# Altium PCB syspcb.PcbDoc (part 1 of 2)
Units mm, origin at the board's own origin, x right, y up, seen from the top; angles counter-clockwise.
Board outline 95.88 x 90.17 mm, 4 copper layers (TOP, GND, VCC, BOT), stack 0.778 mm thick; 67 components, 76 nets, 283 pads, 156 vias.
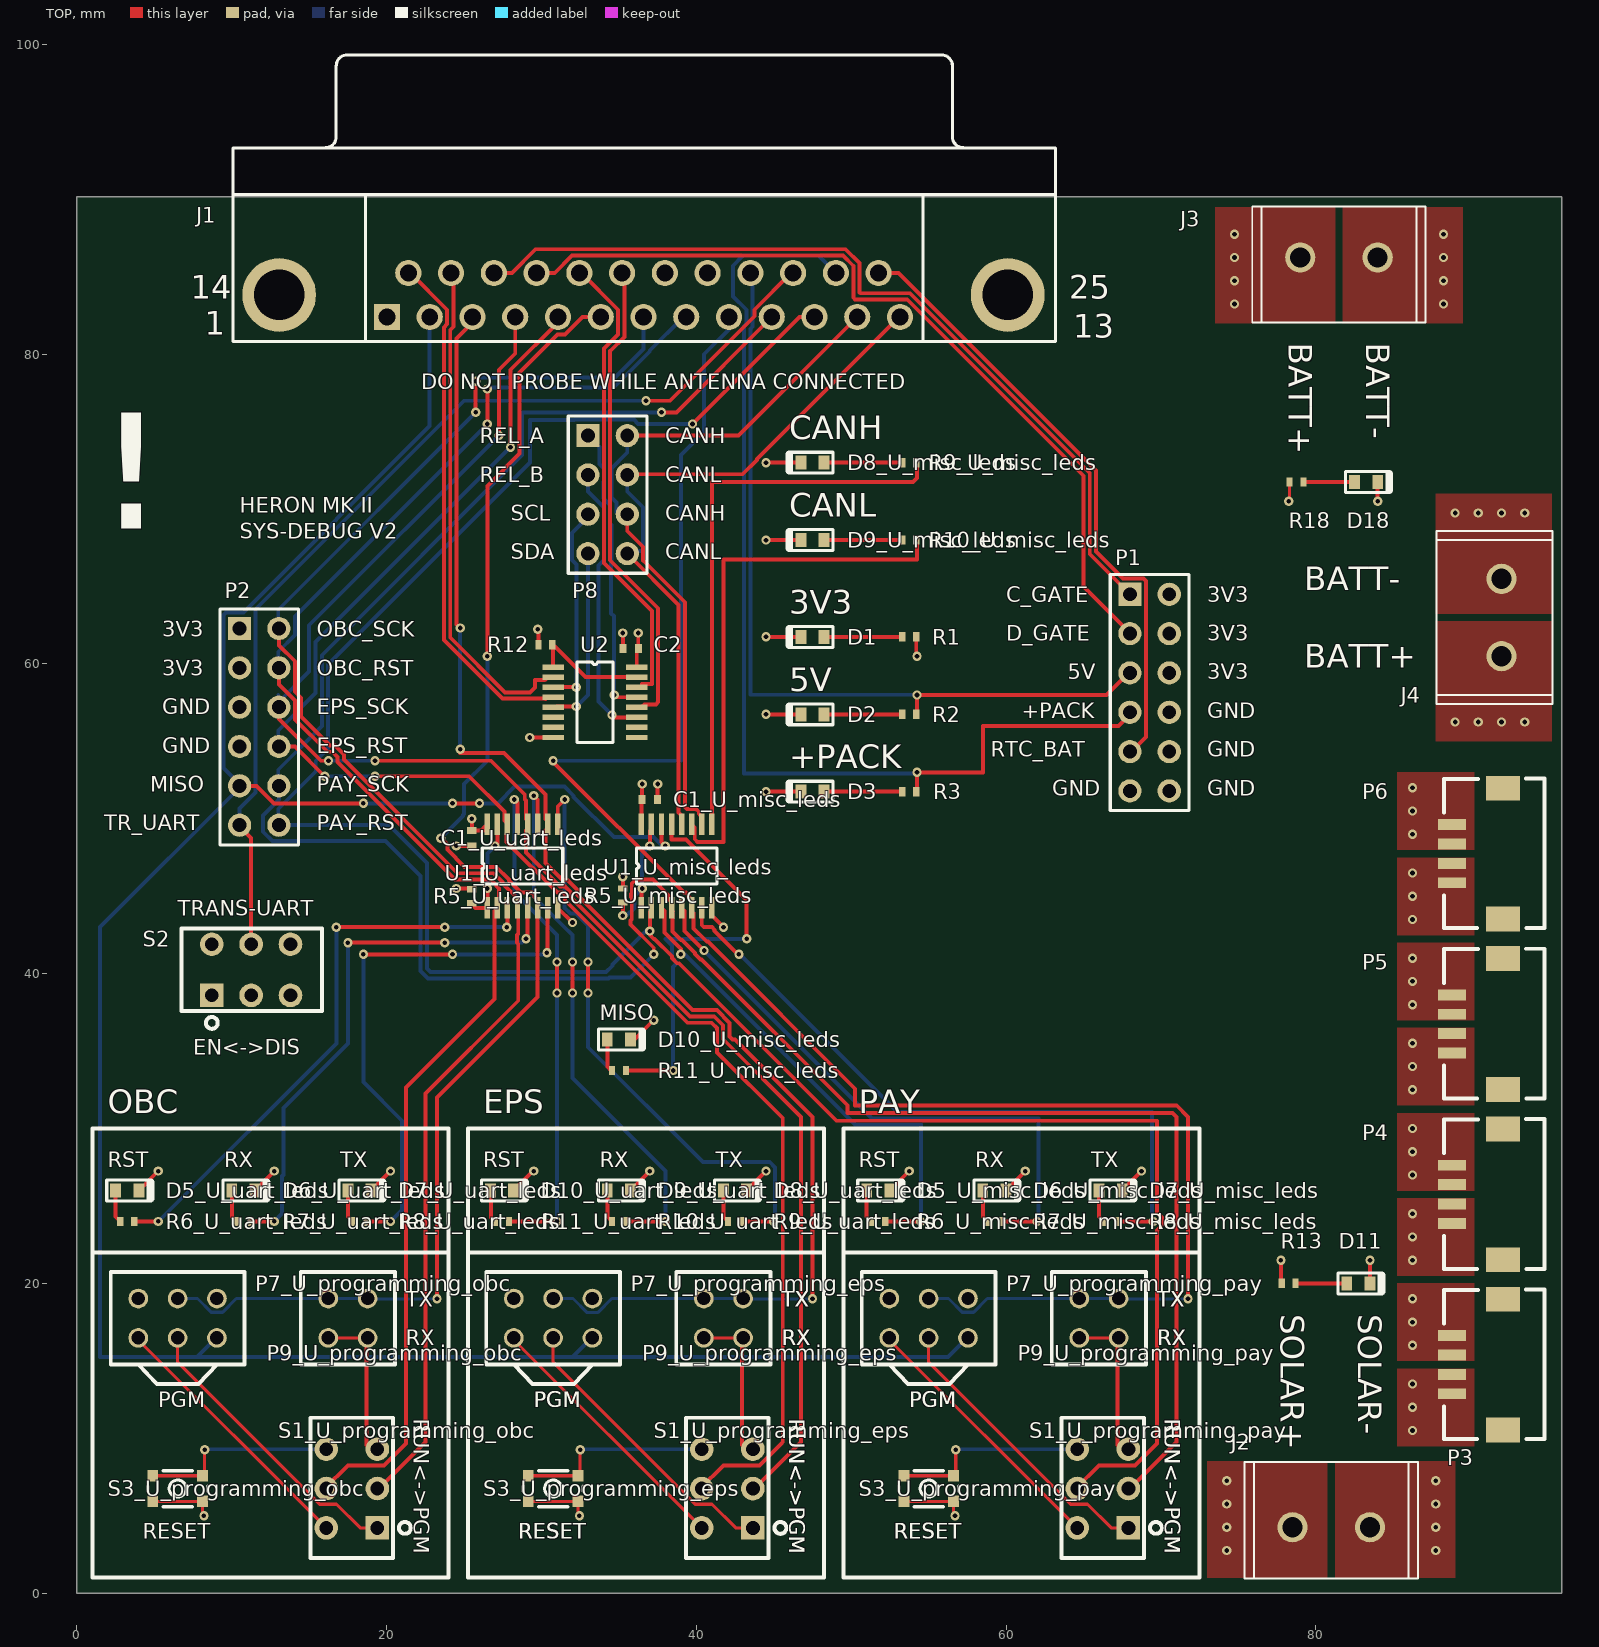
[diagram p0: TOP view]
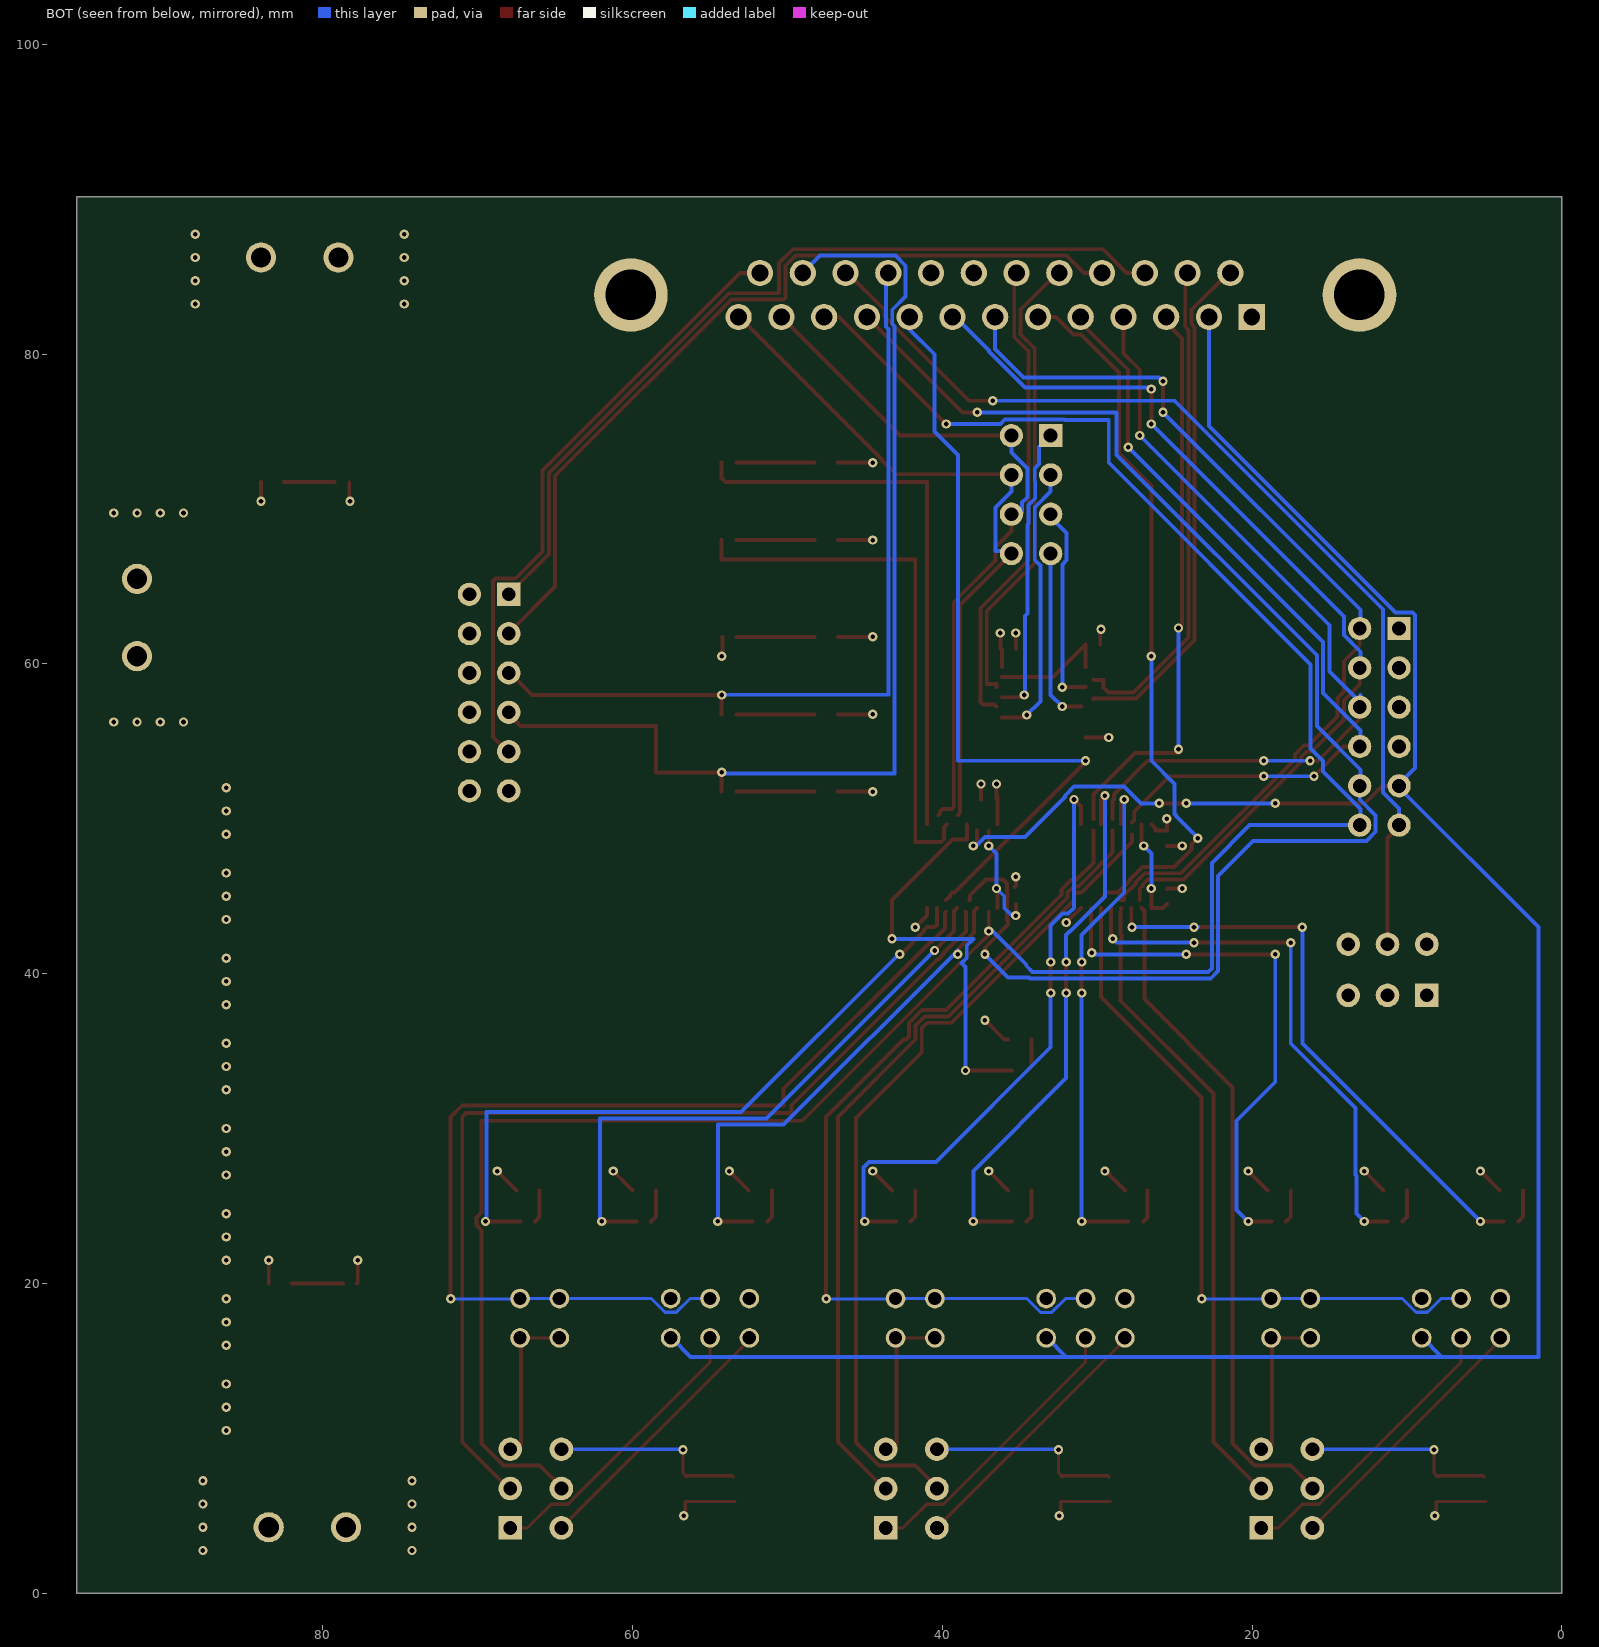
[diagram p1: BOT view, seen from below]
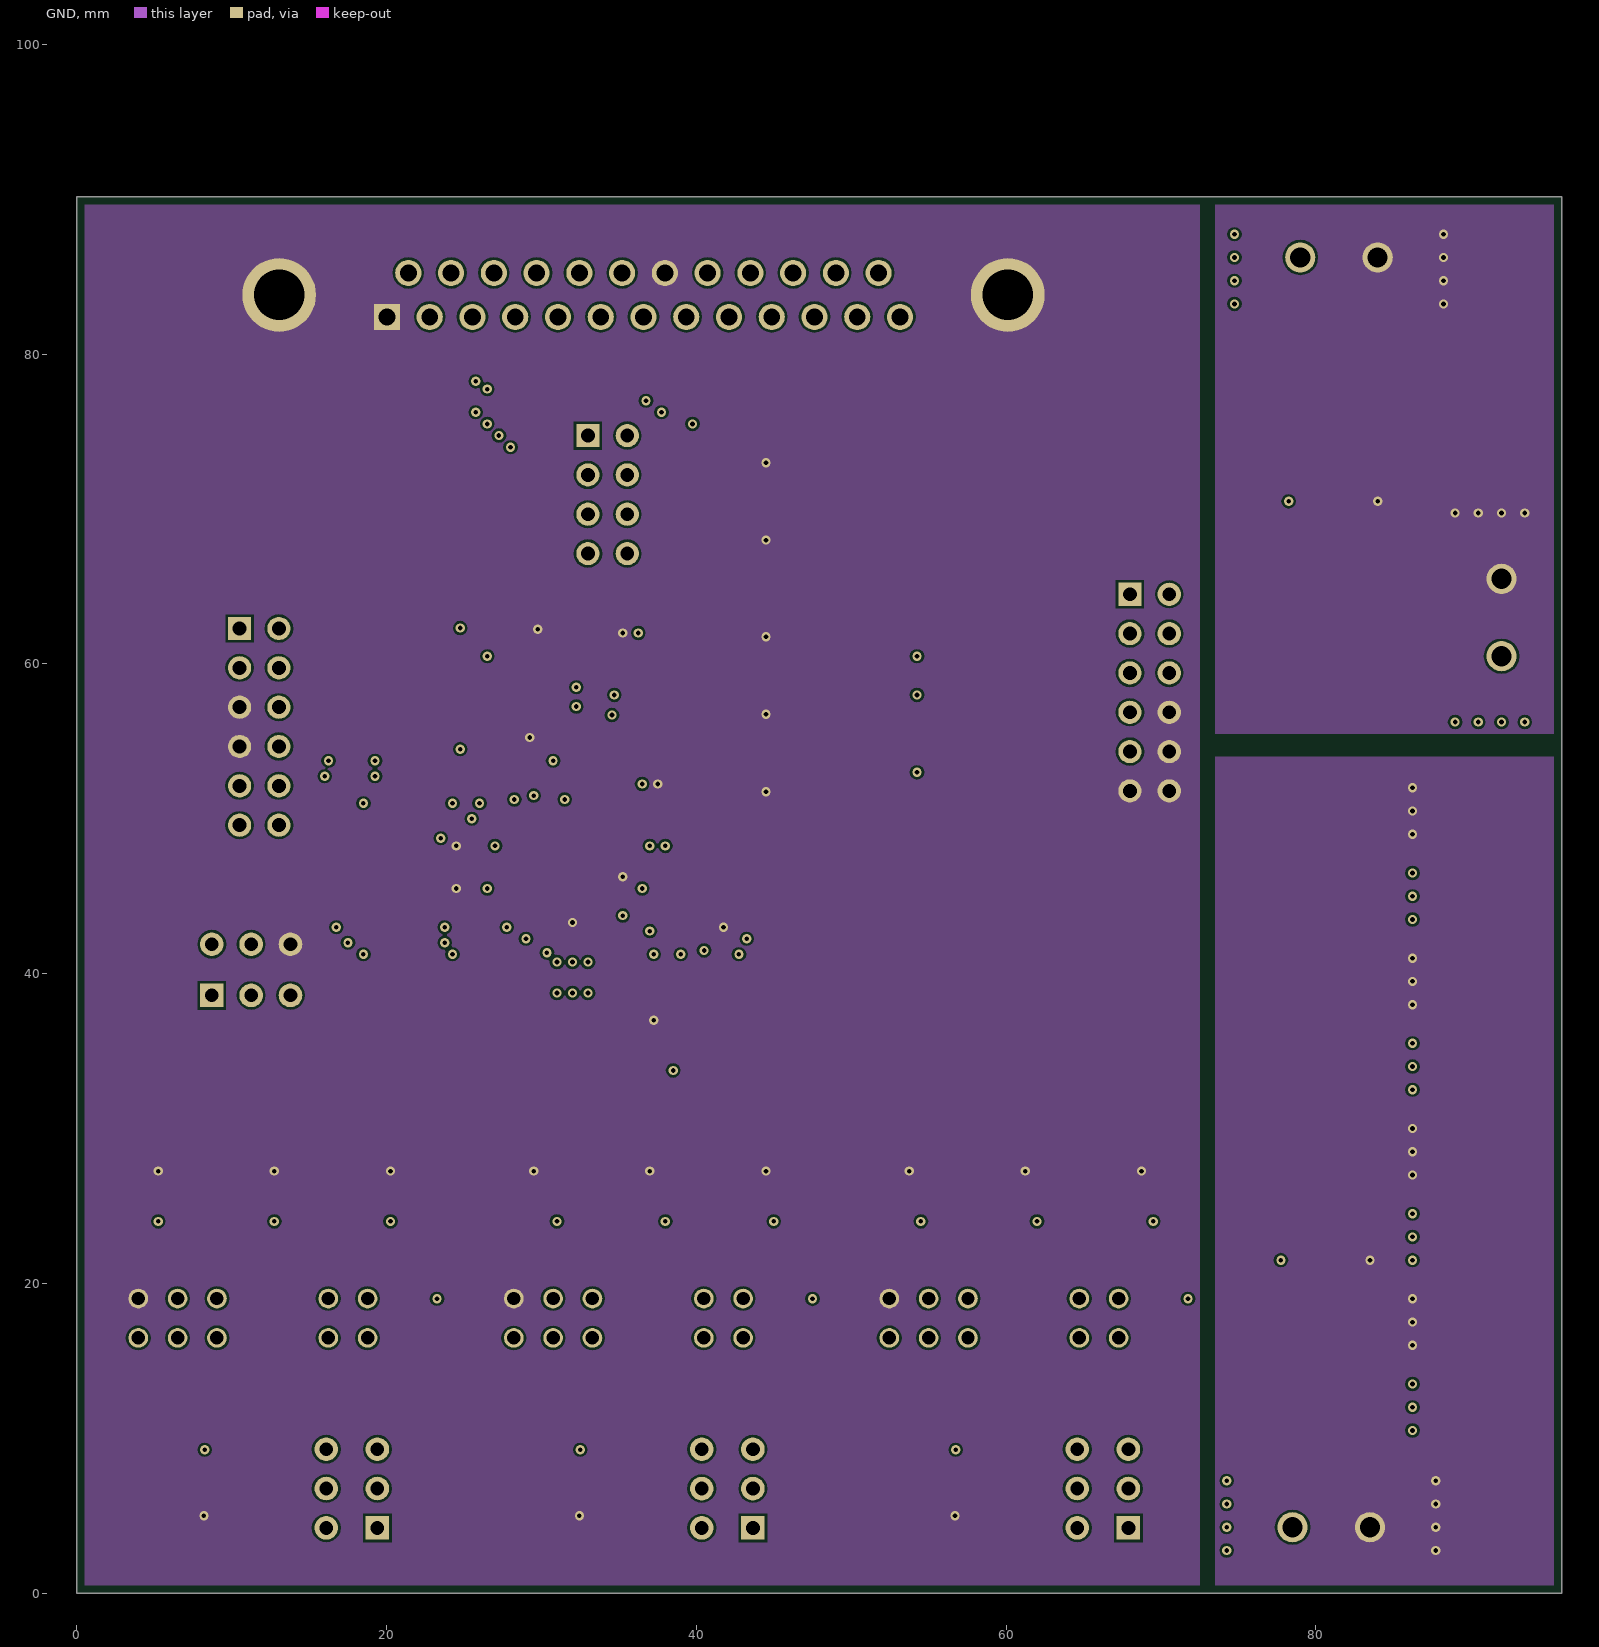
[diagram p2: GND]
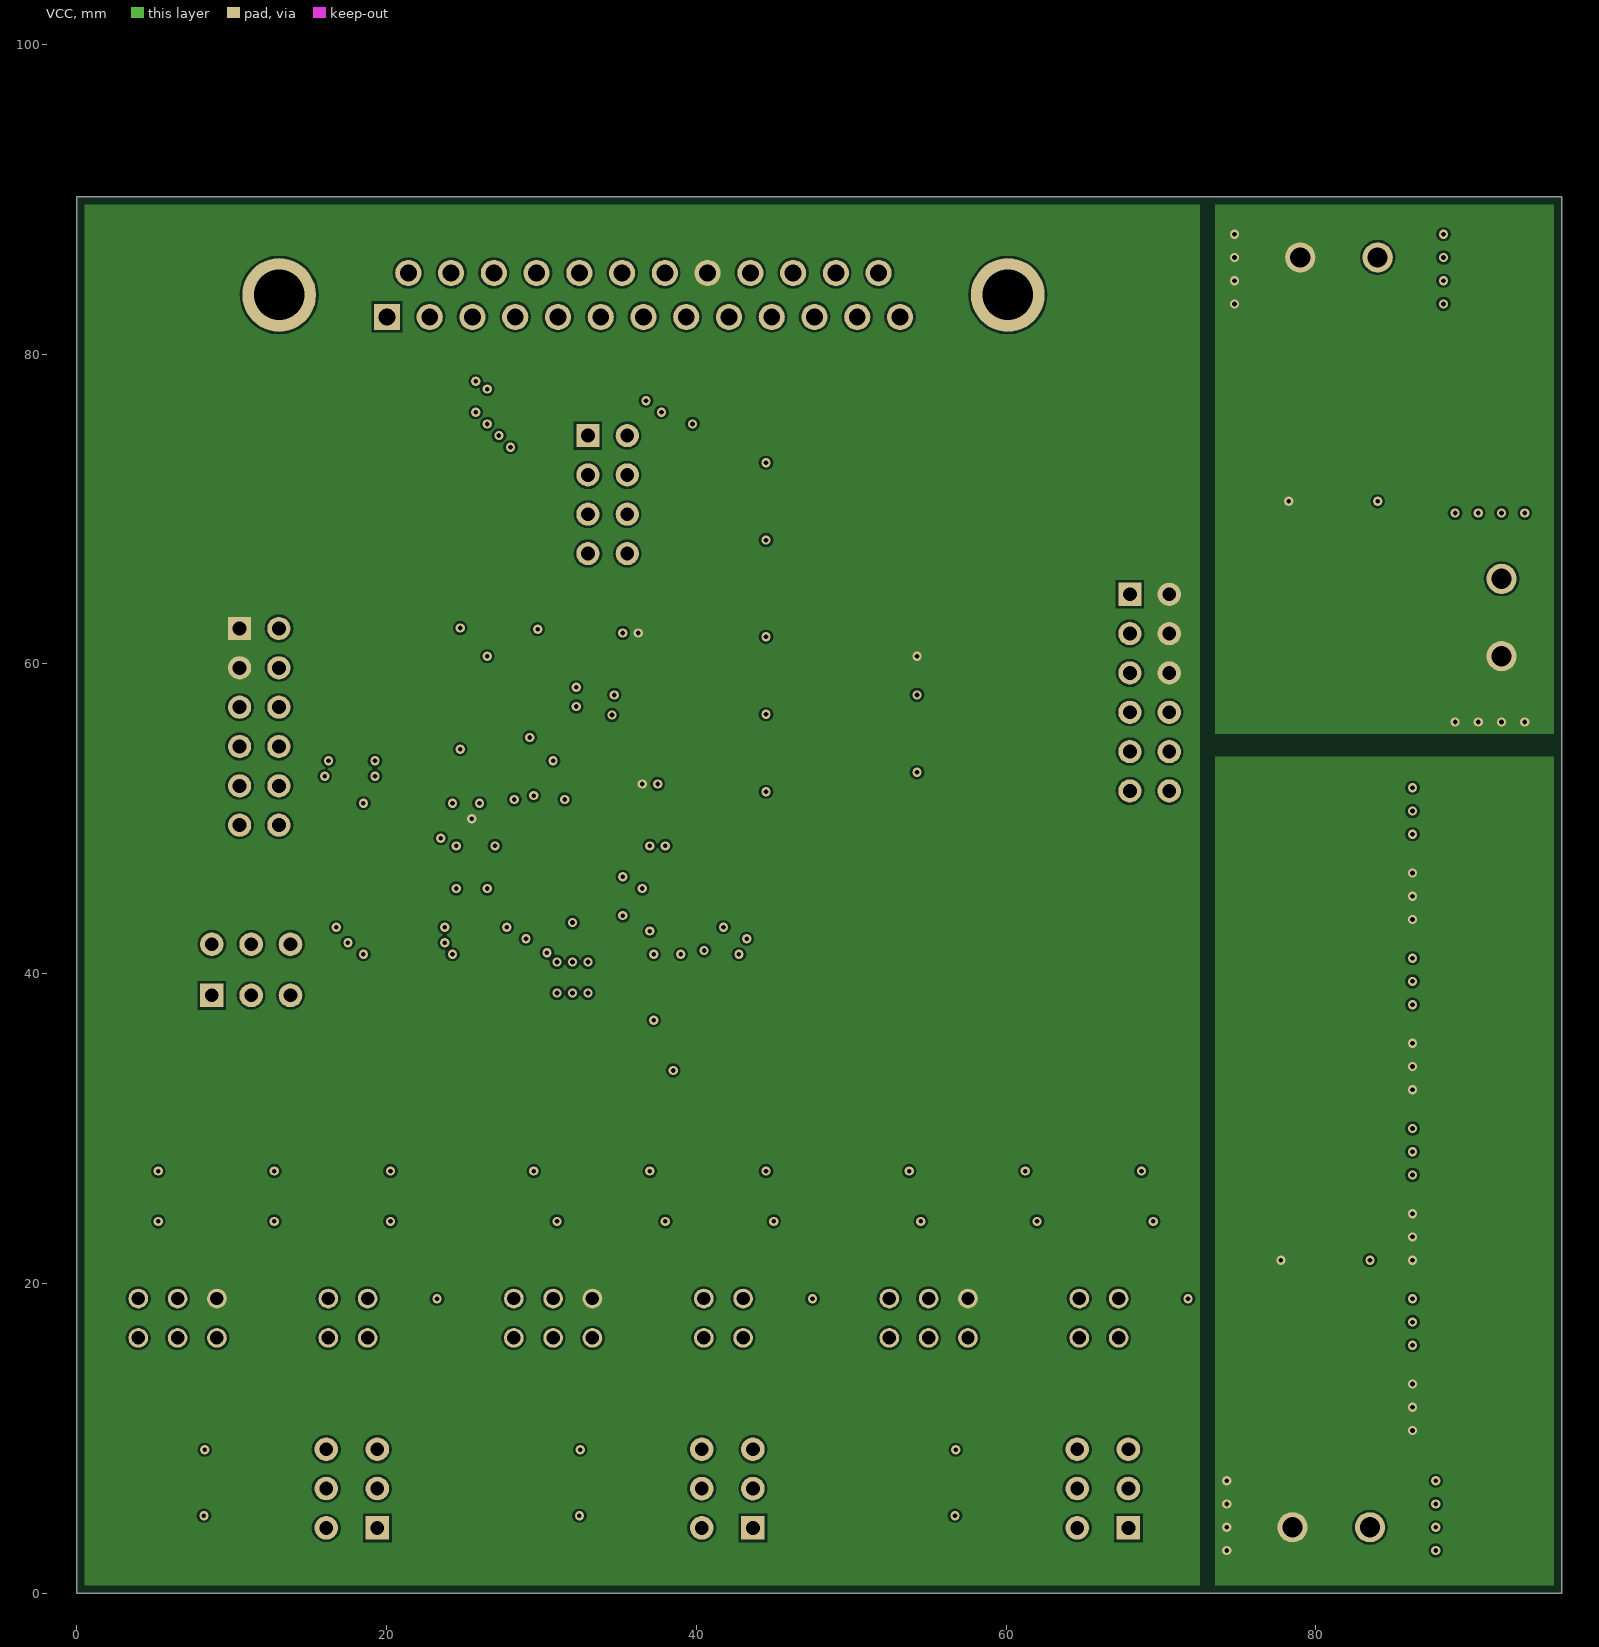
[diagram p3: VCC]
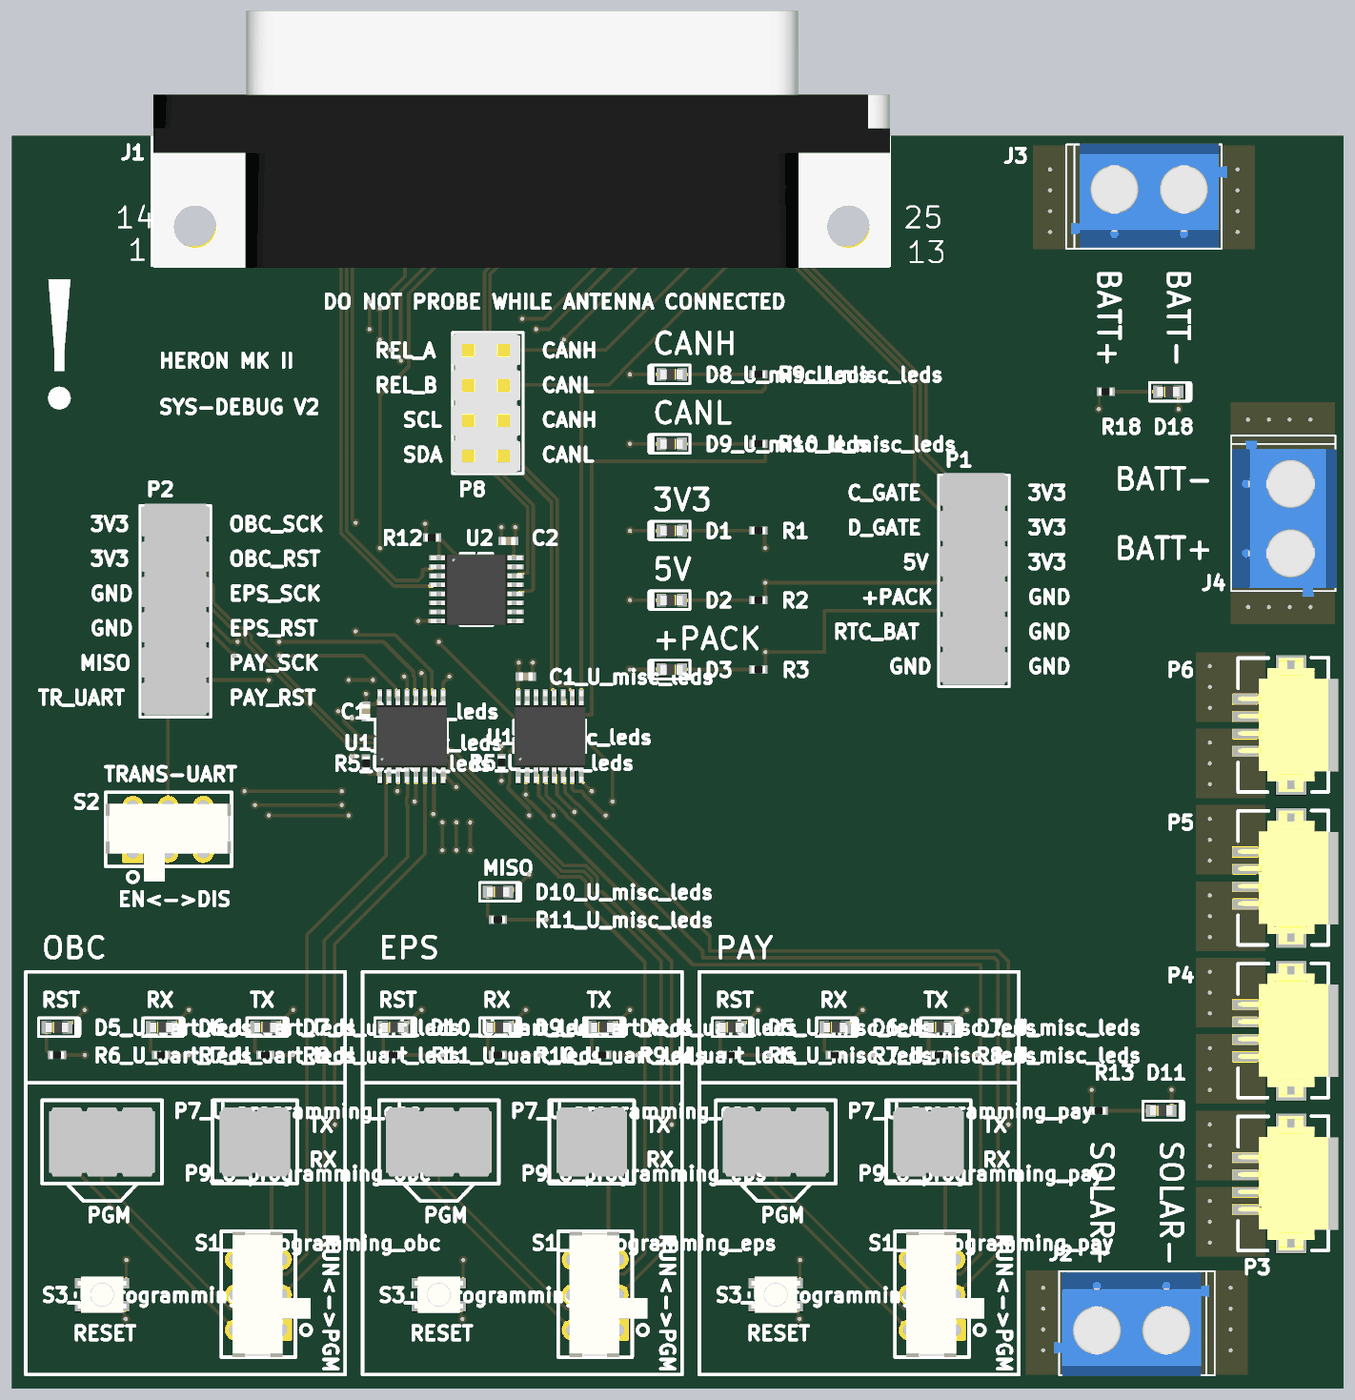
[diagram p4: 3D render of the assembled board from above, using the file's embedded part models]

## Layer stack, top to bottom
Top Solder: solder mask 0.0102, Solder Resist, Dk 3.5
TOP: signal copper 0.0356
Dielectric 1: core 0.254, FR-4, Dk 4.2
GND: signal copper 0.036
Dielectric 3: prepreg 0.127, Dk 4.2
VCC: signal copper 0.036
Dielectric 2: core 0.254, Dk 4.2
BOT: signal copper 0.0356
Bottom Solder: solder mask 0.0102, Solder Resist, Dk 3.5

## Board outline
0,0 95.885,0 95.885,90.17 0,90.17

## Design rules (kind name [scope] priority, off if disabled: settings)
AssemblyTestPointUsage [All] p1 off:
AssemblyTestpoint [All] p1 off: testpointundercomponent=TRUE minsize=1.016 maxsize=2.54 preferedsize=1.524 minholesize=0 maxholesize=1.016 preferedholesize=0.813 testpointgrid=0.025 usegrid=TRUE gridtolerance=0 allowsidetop=TRUE allowsidebottom=TRUE
BoardOutlineClearance [All] p1: gap=0.5 ignorepadtopadclearanceinfootprint=FALSE
Clearance Component_Clearance [IsComponent vs IsComponent] p1: gap=0.254 ignorepadtopadclearanceinfootprint=FALSE
Clearance [All] p2: gap=0.152 ignorepadtopadclearanceinfootprint=TRUE
FabricationTestPointUsage [All] p1 off: valid=0 allowmultiple=FALSE
FabricationTestpoint [All] p1 off: side=3 testpointundercomponent=FALSE minsize=1.016 maxsize=2.54 preferedsize=1.524 minholesize=0 maxholesize=1.016 preferedholesize=0.813 testpointgrid=0.025 allowsidetop=TRUE allowsidebottom=TRUE usegrid=TRUE gridtolerance=0
HoleSize [All] p1: absolutevalues=TRUE maxlimit=6.3 minlimit=0.3 maxpercent=80.000 minpercent=20.000
HoleToHoleClearance [All] p1: gap=0.2 allowstackedmicrovias=FALSE
MinimumAnnularRing [All] p1: minimumring=0.15
MinimumSolderMaskSliver [All] p1: minsoldermaskwidth=0.1
PlaneClearance [All] p1: clearance=0.381
PlaneConnect [All] p1: planeconnectstyle=Direct reliefexpansion=0.508 reliefentries=4 reliefconductorwidth=0.254 reliefairgap=0.254
PolygonConnect [All] p1: connectstyle=Direct reliefconductorwidth=0.254 reliefentries=4 polygonreliefangle="90 Angle" airgapwidth=0.254
RoomDefinition U_programming_pay [InComponentClass('U_programming_pay')] p1: confinementstyle=ConfineIn formatcopy=TRUE lockcomponents=FALSE outline 48.5,0.002 72.75,0.002 72.75,22.75 48.5,22.75
RoomDefinition U_programming_obc [InComponentClass('U_programming_obc')] p2: confinementstyle=ConfineIn formatcopy=TRUE lockcomponents=FALSE outline 0,0.002 24.25,0.002 24.25,22.75 0,22.75
RoomDefinition U_programming_eps [InComponentClass('U_programming_eps')] p3: confinementstyle=ConfineIn formatcopy=TRUE lockcomponents=FALSE outline 24.25,0 48.5,0 48.5,22.748 24.25,22.748
RoutingVias [All] p1: holewidth=0.3 width=0.6 viastyle="Through Hole" minholewidth=0.2 minwidth=0.6 maxholewidth=6.3 maxwidth=10 useviatemplates=TRUE viatemplateguid#1={C38BF27A-4E37-4AD1-9443-A827E1A18062} viatemplatename#1=v60h30m0mx0(Tol8-8)
SilkToSilkClearance [All] p1: silktosilkclearance=0
SilkToSolderMaskClearance [IsPad] p1: minsilkscreentomaskgap=0.2 clearancetoexposedcopper=TRUE
SolderMaskExpansion [All] p1: expansion=0.051
UnConnectedPin [All] p1:
UnRoutedNet [All] p1: checkbadconnections=TRUE
Width [All] p1: maxlimit=25.4 minlimit=0.152 preferedwidth=0.2
18 further rules are at their usual default settings.

## Classes and differential pairs
channel class led-monitoring-SN74HC365PW: U_misc_leds U_uart_leds
channel class programming: U_programming_eps U_programming_obc U_programming_pay
component class U_programming_pay: P7_U_programming_pay P9_U_programming_pay S1_U_programming_pay S3_U_programming_pay
component class U_programming_obc: P7_U_programming_obc P9_U_programming_obc S1_U_programming_obc S3_U_programming_obc
component class U_programming_eps: P7_U_programming_eps P9_U_programming_eps S1_U_programming_eps S3_U_programming_eps
component class U_uart_leds: B1_U_buffered_leds_uart C1_U_uart_leds D2_U_buffered_leds_uart D4_U_buffered_leds_uart D5_U_uart_leds D6_U_buffered_leds_uart D6_U_uart_leds D7_U_uart_leds D8_U_buffered_leds_uart D8_U_uart_leds D9_U_buffered_leds_uart D9_U_uart_leds D10_U_buffered_leds_uart D10_U_uart_leds R5_U_uart_leds R6_U_uart_leds R7_U_uart_leds R8_U_uart_leds R9_U_uart_leds R10_U_uart_leds R11_U_uart_leds U1_U_uart_leds
component class U_misc_leds: B1_U_buffered_leds_other C1_U_misc_leds D2_U_buffered_leds_other D4_U_buffered_leds_other D5_U_misc_leds D6_U_buffered_leds_other D6_U_misc_leds D7_U_misc_leds D8_U_buffered_leds_other D8_U_misc_leds D9_U_buffered_leds_other D9_U_misc_leds D10_U_buffered_leds_other D10_U_misc_leds R5_U_misc_leds R6_U_misc_leds R7_U_misc_leds R8_U_misc_leds R9_U_misc_leds R10_U_misc_leds R11_U_misc_leds U1_U_misc_leds
component class U_eps_power: D11 D18 J2 J3 J4 P3 P4 P5 P6 R13 R18
component class syspcb: C2 D1 D2 D3 J1 P1 P2 P8 R1 R2 R3 R12 S2 U2

## Components (designator, comment, footprint, x,y, rotation, side; value= is the part's Value field where it differs from the comment)
C1_U_misc_leds "0402" CAP0402R 37,51.25 r180 top value=0.1uF (schematic designator C1)
C1_U_uart_leds "0402" CAP0402R 25.5,48.75 r90 top value=0.1uF (schematic designator C1)
C2 "0402" CAP0402R 35.75,61 r0 top value=0.1uF
D1 "=LED3" LED0603 47.5,61.75 r180 top
D2 "=LED4" LED0603 47.5,56.75 r180 top
D3 "=LED5" LED0603 47.5,51.75 r180 top
D5_U_misc_leds "LED0603" LED0603 51.75,26 r0 top (schematic designator D5)
D5_U_uart_leds "LED0603" LED0603 3.25,26 r0 top (schematic designator D5)
D6_U_misc_leds "LED0603" LED0603 59.25,26 r0 top (schematic designator D6)
D6_U_uart_leds "LED0603" LED0603 10.75,26 r0 top (schematic designator D6)
D7_U_misc_leds "LED0603" LED0603 66.75,26 r0 top (schematic designator D7)
D7_U_uart_leds "LED0603" LED0603 18.25,26 r0 top (schematic designator D7)
D8_U_misc_leds "LED0603" LED0603 47.5,73 r180 top (schematic designator D8)
D8_U_uart_leds "LED0603" LED0603 42.5,26 r0 top (schematic designator D8)
D9_U_misc_leds "LED0603" LED0603 47.5,68 r180 top (schematic designator D9)
D9_U_uart_leds "LED0603" LED0603 35,26 r0 top (schematic designator D9)
D10_U_misc_leds "LED0603" LED0603 35,35.75 r0 top (schematic designator D10)
D10_U_uart_leds "LED0603" LED0603 27.45,26 r0 top (schematic designator D10)
D11 "LED0603" LED0603 82.75,20 r0 top
D18 "LED0603" LED0603 83.25,71.75 r0 top
J1 "D-SUB-25POS" D-SUB-25POS 36.586,93.33 r0 top
J2 "691102710002" CON2_SCREW_5.00MM_691102710002 81,4.25 r0 top
J3 "691102710002" CON2_SCREW_5.00MM_691102710002 81.5,86.25 r180 top
J4 "691102710002" CON2_SCREW_5.00MM_691102710002 92,63 r90 top
P1 "SLW-106-01-G-D" SLW-106-01-X-D 68,64.5 r270 top
P2 "SLW-106-01-G-D" SLW-106-01-X-D 10.504,62.29 r270 top
P3 "DF13A-4P-1.25H(51)" DF13A-4P-1.25H(51) 90.75,16 r270 top
P4 "DF13A-4P-1.25H(51)" DF13A-4P-1.25H(51) 90.75,27 r270 top
P5 "DF13A-4P-1.25H(51)" DF13A-4P-1.25H(51) 90.75,38 r270 top
P6 "DF13A-4P-1.25H(51)" DF13A-4P-1.25H(51) 90.75,49 r270 top
P7_U_programming_eps "SLW-103-01-G-D" SLW-103-01-X-D 30.75,17.748 r0 top (schematic designator P7)
P7_U_programming_obc "SLW-103-01-G-D" SLW-103-01-X-D 6.5,17.75 r0 top (schematic designator P7)
P7_U_programming_pay "SLW-103-01-G-D" SLW-103-01-X-D 55,17.75 r0 top (schematic designator P7)
P8 "SLW-104-01-G-D" SLW-104-01-X-D 33,74.75 r270 top
P9_U_programming_eps "SLW-102-01-G-D" SLW-102-01-X-D 41.75,17.748 r0 top (schematic designator P9)
P9_U_programming_obc "SLW-102-01-G-D" SLW-102-01-X-D 17.5,17.75 r0 top (schematic designator P9)
P9_U_programming_pay "SLW-102-01-G-D" SLW-102-01-X-D 66,17.75 r0 top (schematic designator P9)
R1 "0402" RES0402R 53.75,61.75 r0 top value=330
R2 "0402" RES0402R 53.75,56.75 r0 top value=470
R3 "0402" RES0402R 53.75,51.75 r0 top value=470
R5_U_misc_leds "0402" RES0402R 35.25,45.05 r270 top value=10K (schematic designator R5)
R5_U_uart_leds "0402" RES0402R 25.5,45 r270 top value=10K (schematic designator R5)
R6_U_misc_leds "0402" RES0402R 51.75,24 r0 top value=330 (schematic designator R6)
R6_U_uart_leds "0402" RES0402R 3.25,24 r0 top value=330 (schematic designator R6)
R7_U_misc_leds "0402" RES0402R 59.25,24 r0 top value=330 (schematic designator R7)
R7_U_uart_leds "0402" RES0402R 10.75,24 r0 top value=330 (schematic designator R7)
R8_U_misc_leds "0402" RES0402R 66.75,24 r0 top value=330 (schematic designator R8)
R8_U_uart_leds "0402" RES0402R 18.25,24 r0 top value=330 (schematic designator R8)
R9_U_misc_leds "0402" RES0402R 53.75,73 r0 top value=330 (schematic designator R9)
R9_U_uart_leds "0402" RES0402R 42.5,24 r0 top value=330 (schematic designator R9)
R10_U_misc_leds "0402" RES0402R 53.75,68 r0 top value=330 (schematic designator R10)
R10_U_uart_leds "0402" RES0402R 35,24 r0 top value=330 (schematic designator R10)
R11_U_misc_leds "0402" RES0402R 35,33.75 r0 top value=330 (schematic designator R11)
R11_U_uart_leds "0402" RES0402R 27.45,24 r0 top value=330 (schematic designator R11)
R12 "0402" RES0402R 30.25,61.25 r0 top value=10K
R13 "0402" RES0402R 78.25,20 r0 top value=330
R18 "0402" RES0402R 78.75,71.75 r180 top value=330
S1_U_programming_eps "DPDT" "JS202011AQN - Slide Switch" 42,6.748 r180 top (schematic designator S1)
S1_U_programming_obc "DPDT" "JS202011AQN - Slide Switch" 17.75,6.75 r180 top (schematic designator S1)
S1_U_programming_pay "DPDT" "JS202011AQN - Slide Switch" 66.25,6.75 r180 top (schematic designator S1)
S2 "DPDT" "JS202011AQN - Slide Switch" 11.25,40.25 r90 top
S3_U_programming_eps "SW-PB" "PTS830GM140 SMTR LFS - Pushbutton" 30.75,6.748 r0 top (schematic designator S3)
S3_U_programming_obc "SW-PB" "PTS830GM140 SMTR LFS - Pushbutton" 6.5,6.75 r0 top (schematic designator S3)
S3_U_programming_pay "SW-PB" "PTS830GM140 SMTR LFS - Pushbutton" 55,6.75 r0 top (schematic designator S3)
U1_U_misc_leds "SN74HC365PW" SOP65P640X120-16N 36.45,44.25 r90 top (schematic designator U1)
U1_U_uart_leds "SN74HC365PW" SOP65P640X120-16N 26.5,44.25 r90 top (schematic designator U1)
U2 "SN74HC365PW" SOP65P640X120-16N 30.75,59.8 r0 top

## Footprints (in the part's own frame and the unit in brackets; to place one, negate y for a bottom-side part, rotate by r counter-clockwise, add the part's x,y. Pads: shape width x height; smd on the part's side, far side on the other; paste and mask are expansions set on the pad)
CAP0402R [mm] "Capacitor 0402 reflow soldering"
  rect 0.45x0.6 smd mask+0: 1(-0.5,0) 2(0.5,0)
  body extent -0.5,-0.3 0.5,0.3, height 0.2
CON2_SCREW_5.00MM_691102710002 [mm] "2-Pos Screw terminal 5mm pitch"
  round 1.95 hole 1.3: 1(-2.5,0) 2(2.5,0)
  silkscreen extent -5.6,-3.3 5.6,4.2, body extent -5.98,-3.37 5.22,6.6, height 10.03
D-SUB-25POS [mm]
  rect 1.69x1.69 hole 1.09: 1(-16.566,-10.92)
  round 1.69 hole 1.09: 2(-13.805,-10.92) 3(-11.044,-10.92) 4(-8.283,-10.92) 5(-5.522,-10.92) 6(-2.761,-10.92) 7(0,-10.92) 8(2.761,-10.92) 9(5.522,-10.92) 10(8.283,-10.92) 11(11.044,-10.92) 12(13.805,-10.92) 13(16.566,-10.92) 14(-15.185,-8.08) 15(-12.424,-8.08) 16(-9.663,-8.08) 17(-6.902,-8.08) 18(-4.141,-8.08) 19(-1.38,-8.08) 20(1.381,-8.08) 21(4.142,-8.08) 22(6.903,-8.08) 23(9.664,-8.08) 24(12.425,-8.08) 25(15.186,-8.08)
  round 4.76 hole 3.26: 26(-23.526,-9.5) 27(23.526,-9.5)
  silkscreen extent -26.5,-12.5 26.6,6, body extent -26.39,-12.65 26.64,5.84, height 12.55
DF13A-4P-1.25H(51) [mm] "4 pos, 1.25mm pitch DF13 connector (H125779CT-ND)"
  rect 0.7x1.8 smd: 1(-0.625,-1.956) 2(0.625,-1.956) 3(1.875,-1.956) 4(3.125,-1.956)
  rect 1.6x2.2 smd: ""(-2.975,1.344) ""(5.475,1.344)
  silkscreen extent -3.61,-2.46 6.06,4.04, body extent -3.61,-2.46 6.04,4.75, height 3.58
"JS202011AQN - Slide Switch" [mil]
  rect 60x60 hole 35: 1(-65,100)
  round 60 hole 35: 2(-65,0) 3(-65,-100) 4(65,100) 5(65,0) 6(65,-100)
  silkscreen extent -150,-180 105,177, body extent -148,-178 128,176, height 139
LED0603 [mm] "0603 LED footprint, thick line on the cathode"
  rect 0.7x0.9 smd: 1(-0.75,0) 2(0.75,0)
  silkscreen extent -1.32,-0.67 1.52,0.67, body extent -0.8,-0.4 0.8,0.4, height 0.71
"PTS830GM140 SMTR LFS - Pushbutton" [mm] "Low profile pushbutton"
  rect 0.7x0.75 smd: 1(-1.6,0.825) 1(1.6,0.825) 2(-1.6,-0.825) 2(1.6,-0.825)
  silkscreen extent -1.92,-1.17 1.92,1.15, body extent -1.75,-1.3 1.75,1.3, height 1.4
RES0402R [mm] "resistor 0402 reflow soldering"
  rect 0.4x0.6 smd mask+0: 1(-0.45,0) 2(0.45,0)
  body extent -0.5,-0.25 0.5,0.25, height 0.3
SLW-102-01-X-D [mil] "CONN RCPT 4POS 0.1 GOLD PCB"
  round 50 hole 34: 1(50,-50) 2(50,50) 3(-50,-50) 4(-50,50)
  silkscreen extent -120,-118 120,118, body extent -100,-97 100,98, height 180
SLW-103-01-X-D [mil] "CONN RCPT 6POS 0.1 GOLD PCB"
  round 50 hole 34: 1(100,-50) 2(100,50) 3(0,-50) 4(0,50) 5(-100,-50) 6(-100,50)
  silkscreen extent -170,-118 170,118, body extent -150,-97 150,98, height 180
SLW-104-01-X-D [mm]
  rect 1.5x1.5 hole 0.9: 1(0,0)
  round 1.5 hole 0.9: 2(0,2.54) 3(2.54,0) 4(2.54,2.54) 5(5.08,0) 6(5.08,2.54) 7(7.62,0) 8(7.62,2.54)
  silkscreen extent -1.27,-1.27 8.89,3.81, body extent -1.27,-1.33 8.89,3.62, height 4.57
SLW-106-01-X-D [mm]
  rect 1.5x1.5 hole 0.9: 1(0,0)
  round 1.5 hole 0.9: 2(0,2.54) 3(2.54,0) 4(2.54,2.54) 5(5.08,0) 6(5.08,2.54) 7(7.62,0) 8(7.62,2.54) 9(10.16,0) 10(10.16,2.54) 11(12.7,0) 12(12.7,2.54)
  silkscreen extent -1.27,-1.27 13.97,3.81, body extent -1.4,-1.21 13.84,3.75, height 4.57
SOP65P640X120-16N [mm] "SOP + Pitch P + Lead Span Nominal X Height - #Pins"
  rect 1.4x0.35 smd: 1(0,0) 2(0,-0.65) 3(0,-1.3) 4(0,-1.95) 5(0,-2.6) 6(0,-3.25) 7(0,-3.9) 8(0,-4.55) 9(5.4,-4.55) 10(5.4,-3.9) 11(5.4,-3.25) 12(5.4,-2.6) 13(5.4,-1.95) 14(5.4,-1.3) 15(5.4,-0.65) 16(5.4,0)
  silkscreen extent 1.53,-4.88 3.87,0.33, body extent -0.61,-4.84 5.99,0.27, height 1.2

## Part data
C1_U_misc_leds C1_U_uart_leds C2: library part CAP0402, "0402 capacitor", Capacitance=100nF, Case Code (Metric)=1005, Dielectric=X7R, Manufacturer="Taiyo Yuden", Manufacturer Part Number=EMK105B7104KVHF, Max Operating Temperature=125°C, Min Operating Temperature=-55°C, Package Quantity=10000, Ratings=AEC-Q200, Supplier Part Number 1=587-3807-1-ND, Tolerance=10%, Voltage Rating=16V, Case/Package=0402, Case Code (Imperial)=0402, Halogen Free="Halogen Free", Height=0.5mm, Lead Free="Lead Free", Length=0.039inch, Mount="Surface Mount", Packaging="Tape and Reel", Pricing 1="1=0.1, 10=0.057, 100=0.0254, 500=0.01812, 1000=0.01423, 2500=0.01294, 5000=0.0119 (USD)", Stock 1=18196, Supplier 1=Digi-Key, Termination=SMD/SMT, Thickness=0.022inch, Voltage Rating (DC)=16V, Weight=2.3E-05oz, Width=0.02inch
D1 D2 D3: library part LED0603, "Generic 0603 LED. Use ChipLED from Osram for generic ones."
D5_U_misc_leds D5_U_uart_leds D6_U_misc_leds D6_U_uart_leds D7_U_misc_leds D7_U_uart_leds D8_U_misc_leds D8_U_uart_leds D9_U_misc_leds D9_U_uart_leds D10_U_misc_leds D10_U_uart_leds D11 D18: "Generic 0603 LED. Use ChipLED from Osram for generic ones."
J1: "CONN D-SUB PLUG 25POS R/A SOLDER", Supplier Part Number 1=182-25ME-ND, ComponentLink1Description=Datasheet, ComponentLink1URL=https://www.norcomp.net/rohspdfs/Connectors/18Y/182/182-yyy-113Ryy1.pdf, Supplier 1=Digi-Key
J2 J3 J4: "2-POS screw terminal, 5mm pitch", Supplier Part Number 1=732-2028-ND, Supplier 1=Digi-Key
P1 P2: "CONN RCPT 12POS 0.1 GOLD PCB", Supplier Part Number 1=SAM1088-06-ND, Supplier 1=Digi-Key
P3 P4 P5 P6: "4 pos DF13 right angle surface mount connector", Supplier Part Number 1=H125779CT-ND, Supplier 1=Digi-Key
P7_U_programming_eps P7_U_programming_obc P7_U_programming_pay: "6 pos 100mil pitch low profile header", Supplier Part Number 1=SAM1088-03-ND, Supplier 1=Digi-Key
P8: "CONN RCPT 8POS 0.1 GOLD PCB", Supplier Part Number 1=SAM1088-04-ND, ComponentLink1Description="Series Datasheet", ComponentLink1URL=http://suddendocs.samtec.com/prints/slw-1xx-01-x-x-mkt.pdf, Supplier 1=Digi-Key
P9_U_programming_eps P9_U_programming_obc P9_U_programming_pay: "4 pos 100mil pitch low profile header", Supplier Part Number 1=SAM1088-02-ND, Supplier 1=Digi-Key
R1 R2 R3 R13 R18: library part RES0402, "0402 resistor"
R5_U_misc_leds R5_U_uart_leds R12: library part RES0402, "0402 resistor", Case Code (Metric)=1005, Manufacturer=Panasonic, Manufacturer Part Number=ERJ-2RKF1002X, Max Operating Temperature=155°C, Max Power Dissipation=100mW, Min Operating Temperature=-55°C, Package Quantity=1, Resistance=10kR, Supplier Part Number 1=P10.0KLCT-ND, Temperature Coefficient=100ppm/°C, Tolerance=1%, Voltage Rating=50V, Case/Package=0402, Case Code (Imperial)=0402, ComponentLink1Description=http://industrial.panasonic.com/www-data/pdf/AOA0000/AOA0000CE2.pdf?src-supplier=Future+Electronics, ComponentLink1URL=http://industrial.panasonic.com/www-data/pdf/AOA0000/AOA0000CE2.pdf?src-supplier=Future+Electronics, ComponentLink2Description=http://industrial.panasonic.com/www-data/pdf/AOA0000/AOA0000CE2.pdf?src-supplier=Avnet+Europe, ComponentLink2URL=http://industrial.panasonic.com/www-data/pdf/AOA0000/AOA0000CE2.pdf?src-supplier=Avnet+Europe, ComponentLink3Description=https://industrial.panasonic.com/cdbs/www-data/pdf/RDA0000/DMA0000COL11.pdf?src-supplier=Mouser, ComponentLink3URL=https://industrial.panasonic.com/cdbs/www-data/pdf/RDA0000/DMA0000COL11.pdf?src-supplier=Mouser, ComponentLink4Description=http://www.farnell.com/datasheets/1678782.pdf?src-supplier=Element14, ComponentLink4URL=http://www.farnell.com/datasheets/1678782.pdf?src-supplier=Element14, ComponentLink5Description=http://www.farnell.com/datasheets/1911175.pdf?src-supplier=Farnell, ComponentLink5URL=http://www.farnell.com/datasheets/1911175.pdf?src-supplier=Farnell, ComponentLink6Description=http://www.jameco.com/Jameco/Products/ProdDS/1987020.pdf?src-supplier=Jameco, ComponentLink6URL=http://www.jameco.com/Jameco/Products/ProdDS/1987020.pdf?src-supplier=Jameco, ComponentLink7Description=http://industrial.panasonic.com/www-data/pdf/AOA0000/AOA0000CE2.pdf?src-supplier=Avnet, ComponentLink7URL=http://industrial.panasonic.com/www-data/pdf/AOA0000/AOA0000CE2.pdf?src-supplier=Avnet, ComponentLink8Description=http://www.alliedelec.com/m/d/623f45ff1957d936ff56d46fd1c28cac.pdf?src-supplier=Allied+Electronics, ComponentLink8URL=http://www.alliedelec.com/m/d/623f45ff1957d936ff56d46fd1c28cac.pdf?src-supplier=Allied+Electronics, Composition="Thick Film", Contact Plating=Tin, Depth=0.5mm, Features="Automotive AEC-Q200", Height=0.35mm, Lead Free="Lead Free", Length=1mm, Military Standard=Not, Mount="Surface Mount", Number of Pins=2, Number of Terminations=2, Packaging="Tape and Reel", Power Rating=100mW, Pricing 1="1=0.1, 10=0.045, 100=0.0183, 1000=0.00823, 2500=0.00715, 5000=0.0059 (USD)", Radiation Hardening=No, REACH SVHC="No SVHC", Stock 1=14350001, Supplier 1=Digi-Key, Termination=SMD/SMT, Voltage Rating (DC)=50V, Width=0.02inch
R6_U_misc_leds R6_U_uart_leds R7_U_misc_leds R7_U_uart_leds R8_U_misc_leds R8_U_uart_leds R9_U_misc_leds R9_U_uart_leds R10_U_misc_leds R10_U_uart_leds R11_U_misc_leds R11_U_uart_leds: library part RES0402, "0402 resistor", Case Code (Metric)=1005, Manufacturer="TE Connectivity", Manufacturer Part Number=CRGCQ0402F330R, Max Operating Temperature=155°C, Max Power Dissipation=63mW, Min Operating Temperature=-55°C, Resistance=330R, Supplier Part Number 1=A129621CT-ND, Temperature Coefficient=100ppm/°C, Tolerance=1%, Case/Package=0402, Case Code (Imperial)=0402, Composition="Thick Film", Features="Moisture Resistant,Automotive AEC-Q200", Number of Terminations=2, Packaging="Tape and Reel", Pricing 1="1=0.1, 10=0.022, 100=0.009, 1000=0.00406, 2500=0.00352, 5000=0.00291 (USD)", Stock 1=224275, Supplier 1=Digi-Key
S1_U_programming_eps S1_U_programming_obc S1_U_programming_pay S2: library part "DPDT Switch", "DPDT Switch, customized for the pinout of the JS202011AQN switch.", Supplier Part Number 1=401-2000-ND, Supplier 1=Digi-Key
S3_U_programming_eps S3_U_programming_obc S3_U_programming_pay: library part "Pushbutton - Low Profile", "Schematic symbol for a generic 2-pin pushbutton, OFF-mom.", Supplier Part Number 1=CKN10587CT-ND, Supplier 1=Digi-Key
U1_U_misc_leds U1_U_uart_leds U2: "Hex non-inverting buffer with 3-state outputs", Supplier Part Number 1=296-33932-5-ND, Supplier 1=Digi-Key

## Via types
v1: diameter 0.6, hole 0.3, TOP to BOT, tented both sides, 156 vias

## Nets (pads, with @x,y where several pads share a name; then routed paths per layer and width w, separated by ;. In a path a pad name is that pad's centre, name@x,y a point inside that pad or via, vN(x,y) a via of type N, cw(c..) or ccw(c..) an arc to the next point about the centre after c; other vN are vias at no path point)
5V: J1.22 P1.5 R2.2 | length 53.8
  TOP w0.254: R2.2@54.25,56.75 v1(54.25,58) 66.5,58 P1.5@68,59.5
  BOT w0.254: J1.22 43.639,85.1 43.639,81.776 43.489,81.626 43.489,58.011 54.239,58.011 v1(54.25,58)
+PACK: J1.24 P1.7 R3.2 | length 70.1
  TOP w0.254: R3.2@54.25,51.75 v1(54.25,53) 58.5,53 58.5,56 67.25,56 P1.7@68,56.75
  BOT w0.254: J1.24 47.887,86.374 43.023,86.374 42.365,85.716 42.365,83.744 43.233,82.876 43.233,81.944 43.083,81.794 43.083,52.917 54.167,52.917 v1(54.25,53)
ANT_I2C_SCL: J1.15 U2.2 | length 31.9
  TOP w0.254: J1.15 24.312,85.1 24.312,81.776 24.108,81.571 24.108,61.717 27.654,58.171 29.266,58.171 29.579,58.484 29.579,58.954 30.204,58.954 U2.2@30.25,59
ANT_I2C_SCL_BUF: P8.5 U2.3 | length 13
  TOP w0.254: U2.3 v1(32.25,58.5)
  BOT w0.254: v1(32.25,58.5) 32.25,66.424 31.971,66.704 31.971,68.471 P8.5@33,69.5
ANT_I2C_SDA: J1.14 U2.4 | length 33
  TOP w0.254: J1.14 21.532,85.25 23.906,82.876 23.906,81.944 23.701,81.74 23.701,61.549 27.486,57.764 30.236,57.764 U2.4@30.25,57.75
ANT_I2C_SDA_BUF: P8.7 U2.5 | length 11.4
  TOP w0.254: U2.5@31,57.25 v1(32.25,57.25)
  BOT w0.254: v1(32.25,57.25) 33,58 P8.7
ANT_REL_A_3V3: J1.18 U2.14 | length 30.2
  TOP w0.254: J1.18 32.576,85.25 34.95,82.876 34.95,81.286 34.029,80.365 34.029,66.529 37.129,63.429 37.129,58.696 36.5,58.696 U2.14@36.5,58.5
ANT_REL_A_3V3_BUF: P8.1 U2.13 | length 19
  TOP w0.254: v1(34.7,58) 34.85,57.85 U2.13
  BOT w0.254: P8.1 33.75,74 33.75,72.916 34.029,72.636 34.029,71.784 34,71.754 34,70.701 34.436,70.265 34.436,69.064 34.511,68.989 34.511,66.704 34.5,66.693 34.5,63.272 34.671,63.101 34.671,58.029 v1(34.7,58)
ANT_REL_B_3V3: J1.19 U2.12 | length 30.6
  TOP w0.254: J1.19 35.356,85.1 35.356,81.117 34.436,80.197 34.436,66.698 37.536,63.598 37.536,57.531 37.4,57.396 36.646,57.396 U2.12@36.5,57.25
ANT_REL_B_3V3_BUF: P8.3 U2.11 | length 18.2
  TOP w0.254: v1(34.55,56.7) 34.55,56.55 U2.11
  BOT w0.254: P8.3@33,72.25 P8.3 33,71.126 34.029,70.096 34.029,66.704 33.671,66.345 33.671,57.579 v1(34.55,56.7)
BATT+: J3.2 J4.1 R18.2 | length 1.3
  TOP w0.2: v1(78.25,70.5) 78.3,70.55 R18.2
  other v1: 89,56.25 90.5,56.25 92,56.25 93.5,56.25 74.75,83.25 74.75,84.75 74.75,86.25 74.75,87.75
BATT-: D18.2 J3.1 J4.2 | length 1.3
  TOP w0.254: v1(84,70.5) D18.2
  other v1: 89,69.75 90.5,69.75 92,69.75 93.5,69.75 88.25,83.25 88.25,84.75 88.25,86.25 88.25,87.75
BUF_EN_N: R12.2 U2.1 U2.15 | length 7.7
  TOP w0.254: U2.1 30.75,61.25 32.85,59.15 U2.15
BUF_EN_U_misc_leds_N: R5_U_misc_leds.2 U1_U_misc_leds.1 U1_U_misc_leds.15 | length 8.4
  TOP w0.254: v1(35.25,43.75) R5_U_misc_leds.2@35.25,44.5 ; U1_U_misc_leds.1 36.45,45.45 v1(36.5,45.5) ; v1(37,48.25) U1_U_misc_leds.15@37,49.25
  BOT w0.254: v1(35.25,43.75) 35.5,43.75 36,44.25 36,45 v1(36.5,45.5) 36.5,47.75 v1(37,48.25)
BUF_EN_U_uart_leds_N: R5_U_uart_leds.2 U1_U_uart_leds.1 U1_U_uart_leds.15 | length 6.8
  TOP w0.254: R5_U_uart_leds.2@25.5,44.5 25.75,44.25 U1_U_uart_leds.1 v1(26.5,45.5) ; v1(27,48.25) 27.15,48.4 U1_U_uart_leds.15
  BOT w0.254: v1(26.5,45.5) 26.5,47.75 v1(27,48.25)
C_GATE: J1.16 P1.1 | length 55.1
  TOP w0.254: J1.16 28.094,85.25 29.625,86.781 49.645,86.781 50.542,85.884 50.542,84 50.601,83.941 53.787,83.941 65.406,72.321 65.406,67.094 P1.1
CANH: J1.12 P8.2 P8.6 U1_U_misc_leds.10 | length 45.8
  TOP w0.254: P8.6 35.54,68.586 36.569,67.556 36.569,66.675 39.261,63.984 39.261,50.75 39.381,50.629 39.991,50.629 40.154,50.466 40.154,50.346 U1_U_misc_leds.10@40.25,50.25 ; P8.2@35.75,74.75 42.731,74.75 J1.12
  BOT w0.254: P8.6@35.5,69.75 35.54,69.79 34.842,69.79 34.842,70.433 34.511,70.765 34.511,72.636 35.54,73.666 P8.2
CANL: J1.13 P8.4 P8.8 U1_U_misc_leds.12 | length 46.6
  TOP w0.254: P8.4@35.5,72.25 42.992,72.25 43.921,73.178 43.921,73.24 53.091,82.41 J1.13 ; P8.8 38.854,63.816 38.854,50.396 U1_U_misc_leds.12@39,50.25
  BOT w0.254: P8.8@35.5,67.25 35.54,67.29 36.569,67.29 36.569,70.096 35.54,71.126 P8.4
D_GATE: J1.17 P1.3 | length 54.3
  TOP w0.254: J1.17 30.855,85.25 31.979,86.374 49.477,86.374 50.135,85.716 50.135,83.649 50.25,83.534 53.618,83.534 65,72.153 65,65 P1.3@68,62
DIS_TRANS_UARTn: J1.23 P2.11 S2.5 | length 66.3
  TOP w0.254: P2.11@10.5,49.5 11.25,48.75 S2.5 ; v1(36.75,77) 38.289,77 43.745,82.456 43.745,82.876 46.119,85.25 J1.23
  BOT w0.254: P2.11@10.5,49.5 10.5,50.67 11.533,51.704 11.533,63.533 25,77 v1(36.75,77)
EPS_MOSI_A/TX: J1.3 P7_U_programming_eps.4 P9_U_programming_eps.2 P9_U_programming_eps.4 U1_U_uart_leds.10 | length 93
  TOP w0.254: v1(24.75,54.5) 24.75,54.25 27.569,54.25 30.25,51.569 U1_U_uart_leds.10@30.25,50 ; v1(24.75,62.318) 24.514,62.554 24.514,81.014 25.542,82.043 J1.3 ; U1_U_uart_leds.10@30.25,49.25 30.25,47.149 31.357,46.042 31.677,46.042 32.317,45.402 32.317,45.082 39.757,37.642 41.327,37.642 42.142,36.827 42.142,35.933 42.325,35.75 42.5,35.75 47.5,30.75 v1(47.5,18.998)
  BOT w0.2: P7_U_programming_eps.4@30.75,18.998 30.77,19.018 32.035,19.018 32.922,18.131 33.658,18.131 34.545,19.018 P9_U_programming_eps.4 ; P9_U_programming_eps.4@40.5,18.998 40.52,19.018 P9_U_programming_eps.2 ; P9_U_programming_eps.2@43,18.998 v1(47.5,18.998)
  BOT w0.254: v1(24.75,54.5) v1(24.75,62.318)
EPS_RST: J1.5 P2.8 S1_U_programming_eps.5 U1_U_uart_leds.14 | length 106.2
  TOP w0.254: P2.8 14.08,54.67 v1(16,52.75) ; v1(19.25,52.75) 25.32,52.75 27.604,50.466 27.604,49.896 U1_U_uart_leds.14@27.75,49.75 ; U1_U_uart_leds.14@27.75,49 27.75,48.5 31.021,45.229 31.341,45.229 31.504,45.066 31.504,44.746 39.421,36.829 40.99,36.829 41.329,36.49 41.329,34.921 45.579,30.671 45.579,9.744 ; v1(28,74) 28,79 31.064,82.064 J1.5 ; S1_U_programming_eps.5@40.25,6.748 41.749,8.247 44.082,8.247 45.5,9.665
  BOT w0.254: P2.8@13,55 13,55.71 15.406,58.117 15.406,61.406 v1(28,74) ; v1(16,52.75) v1(19.25,52.75)
EPS_SCK_A/RX: J1.4 P2.6 S1_U_programming_eps.2 U1_U_uart_leds.12 | length 104.2
  TOP w0.254: P2.6 13.044,56.456 15.75,53.75 v1(16.25,53.75) ; v1(19.25,53.75) 26.75,53.75 28.921,51.579 28.921,51.26 29,51.181 U1_U_uart_leds.12@29,50 ; v1(27.25,74.75) 27.25,79 28.303,80.054 J1.4 ; U1_U_uart_leds.12@29,49.25 29,47.825 31.189,45.636 31.509,45.636 31.911,45.234 31.911,44.914 39.589,37.236 41.158,37.236 41.736,36.658 41.736,35.764 46.75,30.75 46.75,9.748 S1_U_programming_eps.2@43.75,6.748
  BOT w0.254: 13,58 13,57.5 15,59.5 15,62.5 v1(27.25,74.75) ; v1(16.25,53.75) v1(19.25,53.75)
GND: C1_U_misc_leds.1 C1_U_uart_leds.1 C2.1 D1.2 D2.2 D3.2 D5_U_misc_leds.2 D5_U_uart_leds.2 D6_U_misc_leds.2 D6_U_uart_leds.2 D7_U_misc_leds.2 D7_U_uart_leds.2 D8_U_misc_leds.2 D8_U_uart_leds.2 D9_U_misc_leds.2 D9_U_uart_leds.2 D10_U_misc_leds.2 D10_U_uart_leds.2 J1.1 J1.20 J1.26 J1.27 P1.8 P1.10 P1.11 P1.12 P2.5 P2.7 P7_U_programming_eps.6 P7_U_programming_obc.6 P7_U_programming_pay.6 R5_U_misc_leds.1 R5_U_uart_leds.1 R12.1 S2.6 S3_U_programming_eps.2 S3_U_programming_obc.2 S3_U_programming_pay.2 U1_U_misc_leds.8 U1_U_uart_leds.8 U2.8 | length 51.9
  TOP w0.2: S3_U_programming_obc.2@4.9,5.925 8.1,5.925 8.1,5.1 v1(8.2,5) ; S3_U_programming_eps.2@29.15,5.923 32.35,5.923 32.35,5.098 v1(32.45,4.998) ; S3_U_programming_pay.2@53.4,5.925 56.6,5.925 56.6,5.1 v1(56.7,5)
  TOP w0.254: D5_U_uart_leds.2 v1(5.25,27.25) ; D6_U_uart_leds.2 v1(12.75,27.25) ; D7_U_uart_leds.2 v1(20.25,27.25) ; v1(24.5,45.5) 25.45,45.5 R5_U_uart_leds.1 ; v1(24.5,48.25) C1_U_uart_leds.1 ; D10_U_uart_leds.2 29.45,27.25 v1(29.5,27.25) ; v1(29.25,55.25) U2.8 ; v1(29.75,62.25) 29.8,62.2 R12.1 ; U1_U_uart_leds.8 v1(32,43.3) ; v1(35.25,46.25) 35.25,45.7 R5_U_misc_leds.1@35.35,45.6 ; C2.1 v1(35.25,62) ; D9_U_uart_leds.2 v1(37,27.25) ; D10_U_misc_leds.2 36,35.75 v1(37.25,37) ; C1_U_misc_leds.1 v1(37.5,52.25) ; U1_U_misc_leds.8 41,43.75 v1(41.75,43) ; D8_U_uart_leds.2 v1(44.5,27.25) ; v1(44.5,51.75) D3.2 ; v1(44.5,56.75) D2.2 ; v1(44.5,61.75) D1.2 ; v1(44.5,68) D9_U_misc_leds.2 ; v1(44.5,73) D8_U_misc_leds.2 ; D5_U_misc_leds.2 v1(53.75,27.25) ; D6_U_misc_leds.2 v1(61.25,27.25) ; D7_U_misc_leds.2 v1(68.75,27.25)
LED1_U_misc_leds: D5_U_misc_leds.1 R6_U_misc_leds.1 | length 2.1
  TOP w0.254: D5_U_misc_leds.1 51,24.3 R6_U_misc_leds.1
LED1_U_uart_leds: D5_U_uart_leds.1 R6_U_uart_leds.1 | length 2.1
  TOP w0.254: D5_U_uart_leds.1 2.5,24.3 R6_U_uart_leds.1
LED2_U_misc_leds: D6_U_misc_leds.1 R7_U_misc_leds.1 | length 2.1
  TOP w0.254: D6_U_misc_leds.1 58.5,24.3 R7_U_misc_leds.1
LED2_U_uart_leds: D6_U_uart_leds.1 R7_U_uart_leds.1 | length 2.1
  TOP w0.254: D6_U_uart_leds.1 10,24.3 R7_U_uart_leds.1
LED3_U_misc_leds: D7_U_misc_leds.1 R8_U_misc_leds.1 | length 2.1
  TOP w0.254: D7_U_misc_leds.1 66,24.3 R8_U_misc_leds.1
LED3_U_uart_leds: D7_U_uart_leds.1 R8_U_uart_leds.1 | length 2.1
  TOP w0.254: D7_U_uart_leds.1 17.5,24.3 R8_U_uart_leds.1
LED4_U_misc_leds: D8_U_misc_leds.1 R9_U_misc_leds.1 | length 5.1
  TOP w0.254: D8_U_misc_leds.1 R9_U_misc_leds.1
LED4_U_uart_leds: D8_U_uart_leds.1 R9_U_uart_leds.1 | length 2.1
  TOP w0.254: D8_U_uart_leds.1 41.75,24.3 R9_U_uart_leds.1
LED5_U_misc_leds: D9_U_misc_leds.1 R10_U_misc_leds.1 | length 5.1
  TOP w0.254: D9_U_misc_leds.1 R10_U_misc_leds.1
LED5_U_uart_leds: D9_U_uart_leds.1 R10_U_uart_leds.1 | length 2.1
  TOP w0.254: D9_U_uart_leds.1 34.25,24.3 R10_U_uart_leds.1
LED6_U_misc_leds: D10_U_misc_leds.1 R11_U_misc_leds.1 | length 2.1
  TOP w0.254: D10_U_misc_leds.1 34.25,34 R11_U_misc_leds.1@34.5,33.75
LED6_U_uart_leds: D10_U_uart_leds.1 R11_U_uart_leds.1 | length 2.1
  TOP w0.254: D10_U_uart_leds.1@26.75,26 26.75,24.25 R11_U_uart_leds.1
MISO_A: J1.2 P2.9 P7_U_programming_eps.1 P7_U_programming_obc.1 P7_U_programming_pay.1 U1_U_misc_leds.14 | length 168.5
  TOP w0.254: P2.9 11.588,52.13 12.718,51 v1(18.5,51) ; v1(24.25,51) v1(26,51) ; U1_U_misc_leds.14@37.75,49.25 37.75,48.5 v1(38,48.25)
  BOT w0.254: P7_U_programming_obc.1@9,16.5 7.75,15.25 ; P2.9@10.5,52.25 9.475,53.275 9.475,63.156 9.638,63.319 10.745,63.319 22.781,75.356 J1.2 ; P2.9 10.504,52.004 1.5,43 1.5,15.25 7.75,15.25 ; v1(18.5,51) v1(24.25,51) ; 25.75,15.248 32,15.248 ; 25.75,15.25 7.75,15.25 ; v1(26,51) 27.181,51 28.26,52.079 31.49,52.079 32.079,51.49 32.079,51.421 34.671,48.829 37.24,48.829 37.819,48.25 v1(38,48.25) ; P7_U_programming_eps.1@33.25,16.498 32,15.248 ; P7_U_programming_pay.1@57.5,16.5 56.25,15.25 50,15.25 49.998,15.248 32,15.248
NetD1_1: D1.1 R1.1 | length 5.1
  TOP w0.254: D1.1 R1.1
NetD2_1: D2.1 R2.1 | length 5.1
  TOP w0.254: D2.1 R2.1
NetD3_1: D3.1 R3.1 | length 5.1
  TOP w0.254: D3.1 R3.1
NetD11_1: D11.1 R13.2 | length 3.3
  TOP w0.254: R13.2 D11.1
NetD18_1: D18.1 R18.1 | length 3.3
  TOP w0.254: R18.1@79.25,71.75 D18.1
OBC_MOSI_A/TX: J1.6 P7_U_programming_obc.4 P9_U_programming_obc.2 P9_U_programming_obc.4 U1_U_uart_leds.6 | length 92.6
  TOP w0.254: v1(23.25,19) 23.25,32 29.75,38.5 U1_U_uart_leds.6 ; v1(23.5,48.75) 23.921,48.329 23.921,48.01 25.038,46.892 27.077,46.892 27.892,46.077 27.892,46.003 28.665,45.229 29.391,45.229 29.554,45.066 29.554,44.946 U1_U_uart_leds.6@29.75,44.75 ; v1(26.5,60.5) 26.5,71.5 28.579,73.579 28.579,78.829 31.036,81.286 31.53,81.286 32.655,82.41 J1.6
  BOT w0.2: P7_U_programming_obc.4@6.5,19 6.52,19.02 7.785,19.02 8.672,18.133 9.408,18.133 10.295,19.02 P9_U_programming_obc.4 ; P9_U_programming_obc.4@16.25,19 16.27,19.02 P9_U_programming_obc.2 ; P9_U_programming_obc.2@18.75,19 v1(23.25,19)
  BOT w0.254: v1(23.5,48.75) 24.921,50.171 24.921,50.24 25,50.319 25,52.25 26.5,53.75 v1(26.5,60.5)
OBC_RST: J1.8 P2.4 S1_U_programming_obc.5 U1_U_uart_leds.2 | length 104.1
  TOP w0.254: P2.4 13.044,58.666 14.073,57.636 14.073,56.427 16.171,54.329 16.49,54.329 16.829,53.99 16.829,53.671 24.421,46.079 26.74,46.079 27.079,45.74 27.079,45.666 27.25,45.495 U1_U_uart_leds.2@27.25,44.75 ; S1_U_programming_obc.5@16,6.75 17.499,8.249 19.832,8.249 21.25,9.666 21.25,32.646 26.954,38.35 26.954,44.054 U1_U_uart_leds.2 ; v1(26.5,75.5) 26.5,77.25 v1(26.5,77.75)
  BOT w0.254: P2.4@13,60 13,60.79 14.073,61.864 14.073,63.073 v1(26.5,75.5) ; v1(26.5,77.75) 26.594,77.844 34.668,77.844 36.993,80.168 36.993,80.243 39.16,82.41 J1.8
OBC_SCK_A/RX: J1.7 P2.2 S1_U_programming_obc.2 U1_U_uart_leds.4 | length 101.5
  TOP w0.254: P2.2 13.044,61.206 14.073,60.176 14.073,58.211 14.48,57.805 14.48,56.595 16.339,54.736 16.658,54.736 17.236,54.158 17.236,53.839 24.589,46.486 26.908,46.486 27.486,45.908 27.486,45.834 28.254,45.066 28.254,44.75 U1_U_uart_leds.4@28.5,44.75 ; S1_U_programming_obc.2@19.5,6.75 22.5,9.75 22.5,32.25 28.5,38.25 28.5,41.931 28.421,42.01 28.421,42.49 28.5,42.569 U1_U_uart_leds.4@28.5,44 ; v1(25.75,76.25) v1(25.75,78.25) ; U1_U_uart_leds.4@28.421,44.221 U1_U_uart_leds.4
  BOT w0.254: P2.2@13,62.5 13,63.5 v1(25.75,76.25) ; v1(25.75,78.25) 26,78.5 34.75,78.5 36.586,80.336 J1.7
OUT1_U_misc_leds: R6_U_misc_leds.2 U1_U_misc_leds.3 | length 32.4
  TOP w0.254: U1_U_misc_leds.3 37.946,44.054 37.946,42.66 39,41.606 v1(39,41.25) ; R6_U_misc_leds.2@52.25,24 v1(54.5,24)
  BOT w0.254: v1(39,41.25) 39,41.505 50.255,30.25 54.5,30.25 v1(54.5,24)
OUT1_U_uart_leds: R6_U_uart_leds.2 U1_U_uart_leds.3 | length 37.8
  TOP w0.254: R6_U_uart_leds.2@3.75,24 v1(5.25,24) ; v1(16.75,43) v1(23.75,43) ; v1(27.75,43) 27.8,43.05 U1_U_uart_leds.3
  BOT w0.254: v1(5.25,24) 16.75,35.5 v1(16.75,43) ; v1@23.5,43 v1(23.75,43) v1(27.75,43)
OUT2_U_misc_leds: R7_U_misc_leds.2 U1_U_misc_leds.5 | length 38.4
  TOP w0.254: U1_U_misc_leds.5 39.246,44.054 39.246,42.754 v1(40.5,41.5) ; R7_U_misc_leds.2@59.75,24 v1(62,24)
  BOT w0.254: v1(40.5,41.5) 51.344,30.656 62.094,30.656 62.094,24.094 v1(62,24)
OUT2_U_uart_leds: R7_U_uart_leds.2 U1_U_uart_leds.5 | length 35.1
  TOP w0.254: R7_U_uart_leds.2@11.25,24 v1(12.75,24) ; v1(17.5,42) v1(23.75,42) ; v1(29,42.25) 29.1,42.35 U1_U_uart_leds.5
  BOT w0.254: v1(12.75,24) 13.25,24.5 13.25,26.931 13.329,27.01 13.329,31.329 17.5,35.5 v1(17.5,42) ; v1(23.75,42) 28.75,42 v1(29,42.25)
OUT3_U_misc_leds: R8_U_misc_leds.2 U1_U_misc_leds.7 | length 44.6
  TOP w0.254: U1_U_misc_leds.7 40.35,43.15 40.5,43 40.75,43 41,43 41.171,42.829 41.171,42.76 42.681,41.25 v1(42.75,41.25) ; R8_U_misc_leds.2@67.25,24 v1(69.5,24)
  BOT w0.254: v1(42.75,41.25) 42.813,41.25 53,31.063 69.437,31.063 69.437,24.063 v1(69.5,24)
OUT3_U_uart_leds: R8_U_uart_leds.2 U1_U_uart_leds.7 | length 34.9
  TOP w0.254: v1(18.5,41.25) v1(24.25,41.25) ; R8_U_uart_leds.2@18.75,24 v1(20.25,24) ; v1(30.35,41.35) 30.4,41.35 U1_U_uart_leds.7
  BOT w0.254: v1(18.5,41.25) 18.5,33 21,30.5 21,24.75 v1(20.25,24) ; v1(24.25,41.25) 30.25,41.25 v1(30.35,41.35)
OUT4_U_misc_leds: R9_U_misc_leds.2 U1_U_misc_leds.9 | length 36.5
  TOP w0.254: U1_U_misc_leds.9 41,71.75 54,71.75 54.25,72 R9_U_misc_leds.2@54.25,73
OUT4_U_uart_leds: R9_U_uart_leds.2 U1_U_uart_leds.9 | length 39.4
  TOP w0.254: U1_U_uart_leds.9 31.05,50.8 v1(31.5,51.25) ; v1(33,38.75) v1(33,40.75) ; R9_U_uart_leds.2@43,24 v1(45,24)
  BOT w0.254: v1(31.5,51.25) 31.5,44.25 31.871,43.879 32.24,43.879 33,43.119 v1(33,40.75) ; v1(33,38.75) 33,35.25 40.421,27.829 44.74,27.829 45.079,27.49 45.079,24.079 v1(45,24)
OUT5_U_misc_leds: R10_U_misc_leds.2 U1_U_misc_leds.11 | length 35
  TOP w0.254: U1_U_misc_leds.11 39.896,49.454 39.896,48.679 40.075,48.5 41.75,48.5 41.75,66.75 54.25,66.75 R10_U_misc_leds.2@54.25,68
OUT5_U_uart_leds: R10_U_uart_leds.2 U1_U_uart_leds.11 | length 35.5
  TOP w0.254: v1(29.5,51.5) 29.75,51.25 U1_U_uart_leds.11 ; v1(32,38.75) v1(32,40.75) ; R10_U_uart_leds.2@35.5,24 v1(38,24)
  BOT w0.254: v1(29.5,51.5) 29.5,44.981 31.76,42.721 31.779,42.721 32,42.5 v1(32,40.75) ; v1(32,38.75) 32,33.25 38,27.25 v1(38,24)
OUT6_U_misc_leds: R11_U_misc_leds.2 U1_U_misc_leds.13 | length 27.1
  TOP w0.254: R11_U_misc_leds.2@35.5,33.75 v1(38.5,33.75) ; U1_U_misc_leds.13 38.4,48.671 39.329,48.671 43.25,44.75 v1(43.25,42.25)
  BOT w0.254: v1(38.5,33.75) 38.5,40.431 38.75,40.681 38.421,41.01 38.421,41.829 38,42.25 v1(43.25,42.25)
OUT6_U_uart_leds: R11_U_uart_leds.2 U1_U_uart_leds.13 | length 33.1
  TOP w0.254: R11_U_uart_leds.2@28,24 v1(31,24) ; v1(28.25,51.25) 28.45,51.05 U1_U_uart_leds.13 ; v1(31,38.75) v1(31,40.75)
  BOT w0.254: v1(28.25,51.25) 28.25,45.25 31,42.5 v1(31,40.75) ; v1(31,24) v1(31,38.75)
PAY_MOSI_A/TX: J1.9 P7_U_programming_pay.4 P9_U_programming_pay.2 P9_U_programming_pay.4 U1_U_misc_leds.6 | length 118.9
  TOP w0.254: v1(30.75,53.75) 30.75,53.681 39.201,45.229 39.341,45.229 39.504,45.066 39.504,44.996 U1_U_misc_leds.6@39.75,44.75 ; U1_U_misc_leds.6@39.75,44 39.829,43.921 39.829,42.921 40.671,42.079 40.74,42.079 50.25,32.569 50.25,31.5 ; 50.325,31.5 71,31.5 71.75,30.75 v1(71.75,19)
  BOT w0.2: P7_U_programming_pay.4@55,19 55.02,19.02 56.285,19.02 57.172,18.133 57.908,18.133 58.795,19.02 P9_U_programming_pay.4 ; P9_U_programming_pay.4@64.75,19 64.77,19.02 P9_U_programming_pay.2 ; P9_U_programming_pay.2@67.25,19 v1(71.75,19)
  BOT w0.254: v1(30.75,53.75) 39,53.75 39,73.5 40.5,75 40.5,80 42.108,81.608 J1.9
PAY_RST: J1.11 P2.12 S1_U_programming_pay.5 U1_U_misc_leds.2 | length 154.2
  TOP w0.254: U1_U_misc_leds.2@37,44 v1(37,42.75) 37,42.5 37.25,42.25 37.294,42.25 38.421,41.123 38.421,41.01 38.76,40.671 38.873,40.671 49.044,30.5 69.75,30.5 69.75,24.569 70.079,24.24 70.079,23.76 69.75,23.431 69.75,9.666 68.332,8.249 65.999,8.249 S1_U_programming_pay.5@64.5,6.75 ; v1(39.75,75.5) 46.66,82.41 J1.11
  BOT w0.254: P2.12@13,49.5 13,50.63 15.421,53.051 15.421,53.74 16.219,54.539 16.219,59.969 29.25,73 29.25,75.75 32.105,75.75 32.134,75.779 35.966,75.779 36.246,75.5 v1(39.75,75.5) ; P2.12 20.16,49.59 22.594,47.156 22.594,40.332 22.832,40.094 34.163,40.094 34.579,40.51 34.579,40.579 36.75,42.75 v1(37,42.75)
PAY_SCK_A/RX: J1.10 P2.10 S1_U_programming_pay.2 U1_U_misc_leds.4 | length 158.6
  TOP w0.254: v1(37.25,41.25) 37.25,41.675 35.75,43.175 35.75,43.431 35.829,43.51 35.829,44.916 35.79,44.955 35.79,45.145 35.829,45.184 35.829,45.829 36.079,46.079 37.191,46.079 38.204,45.066 38.204,44.796 U1_U_misc_leds.4@38.25,44.75 ; v1(37.75,76.25) 38.709,76.25 J1.10 ; U1_U_misc_leds.4@38.5,44 38.471,43.971 38.471,42.71 39.01,42.171 39.079,42.171 39.921,41.329 39.921,41.26 40.26,40.921 40.329,40.921 49.75,31.5 49.75,31 70.75,31 71,30.75 71,9.75 S1_U_programming_pay.2@68,6.75
  BOT w0.254: P2.10@13,52.5 13,53.17 15.813,55.983 15.813,60.563 28.75,73.5 28.75,76.25 v1(37.75,76.25) ; P2.10 13.044,51.249 12.015,50.22 12.015,49.164 12.618,48.561 19.939,48.561 22.187,46.313 22.187,40.163 22.663,39.687 34.331,39.687 34.394,39.75 35.75,39.75 v1(37.25,41.25)
RST_PGM_U_programming_eps: P7_U_programming_eps.5 S1_U_programming_eps.4 | length 17.3
  TOP w0.2: P7_U_programming_eps.5@28.25,16.498 28.25,16.307 S1_U_programming_eps.4
RST_PGM_U_programming_obc: P7_U_programming_obc.5 S1_U_programming_obc.4 | length 17.3
  TOP w0.2: P7_U_programming_obc.5@4,16.5 4,16.309 S1_U_programming_obc.4
RST_PGM_U_programming_pay: P7_U_programming_pay.5 S1_U_programming_pay.4 | length 17.3
  TOP w0.2: P7_U_programming_pay.5@52.5,16.5 52.5,16.309 S1_U_programming_pay.4
RST_RUN_U_programming_eps: S1_U_programming_eps.6 S3_U_programming_eps.1 | length 12.9
  TOP w0.2: S3_U_programming_eps.1@29.25,7.498 29.325,7.573 S3_U_programming_eps.1@32.325,7.573 ; S3_U_programming_eps.1@32.25,7.498 S3_U_programming_eps.1@32.325,7.573 ; S3_U_programming_eps.1@32.35,7.573 S3_U_programming_eps.1@32.325,7.573 ; v1(32.5,9.248) 32.5,7.748 S3_U_programming_eps.1@32.325,7.573
  BOT w0.2: v1(32.5,9.248) 32.54,9.288 S1_U_programming_eps.6
RST_RUN_U_programming_obc: S1_U_programming_obc.6 S3_U_programming_obc.1 | length 12.9
  TOP w0.2: S3_U_programming_obc.1@5,7.5 5.075,7.575 S3_U_programming_obc.1@8.075,7.575 ; S3_U_programming_obc.1@8,7.5 S3_U_programming_obc.1@8.075,7.575 ; S3_U_programming_obc.1@8.1,7.575 S3_U_programming_obc.1@8.075,7.575 ; v1(8.25,9.25) 8.25,7.75 S3_U_programming_obc.1@8.075,7.575
  BOT w0.2: v1(8.25,9.25) 8.29,9.29 S1_U_programming_obc.6
RST_RUN_U_programming_pay: S1_U_programming_pay.6 S3_U_programming_pay.1 | length 12.9
  TOP w0.2: S3_U_programming_pay.1@53.5,7.5 53.575,7.575 S3_U_programming_pay.1@56.575,7.575 ; S3_U_programming_pay.1@56.5,7.5 S3_U_programming_pay.1@56.575,7.575 ; S3_U_programming_pay.1@56.6,7.575 S3_U_programming_pay.1@56.575,7.575 ; v1(56.75,9.25) 56.75,7.75 S3_U_programming_pay.1@56.575,7.575
  BOT w0.2: v1(56.75,9.25) 56.79,9.29 S1_U_programming_pay.6
RTC_VBAT: J1.25 P1.9 | length 39.7
  TOP w0.254: J1.25 53.052,85.25 65.813,72.489 65.813,67.262 67.545,65.529 68.866,65.529 69.029,65.366 69.029,55.279 P1.9@68.25,54.5
SCK_PGM_U_programming_eps: P7_U_programming_eps.3 S1_U_programming_eps.1 | length 18.9
  TOP w0.2: P7_U_programming_eps.3@30.75,16.498 30.75,14.913 39.929,5.734 41.014,5.734 42.54,4.208 S1_U_programming_eps.1
SCK_PGM_U_programming_obc: P7_U_programming_obc.3 S1_U_programming_obc.1 | length 18.9
  TOP w0.2: P7_U_programming_obc.3@6.5,16.5 6.5,14.914 15.679,5.736 16.764,5.736 18.29,4.21 S1_U_programming_obc.1
SCK_PGM_U_programming_pay: P7_U_programming_pay.3 S1_U_programming_pay.1 | length 18.9
  TOP w0.2: P7_U_programming_pay.3@55,16.5 55,14.914 64.179,5.736 65.264,5.736 66.79,4.21 S1_U_programming_pay.1
SCK_RUN_U_programming_eps: P9_U_programming_eps.1 P9_U_programming_eps.3 S1_U_programming_eps.3 | length 10.8
  TOP w0.2: P9_U_programming_eps.3@40.5,16.498 40.52,16.478 42.95,16.478 P9_U_programming_eps.1
  TOP w0.254: P9_U_programming_eps.3@40.25,16.748 40.327,16.825 P9_U_programming_eps.3@40.41,16.825 ; P9_U_programming_eps.1@42.95,16.825 42.95,16.478 42.95,9.548 S1_U_programming_eps.3@43.5,8.998
SCK_RUN_U_programming_obc: P9_U_programming_obc.1 P9_U_programming_obc.3 S1_U_programming_obc.3 | length 10.8
  TOP w0.2: P9_U_programming_obc.3@16.25,16.5 16.27,16.48 18.7,16.48 P9_U_programming_obc.1
  TOP w0.254: P9_U_programming_obc.3@16,16.75 16.077,16.827 P9_U_programming_obc.3@16.16,16.827 ; P9_U_programming_obc.1@18.7,16.827 18.7,16.48 18.7,9.55 S1_U_programming_obc.3@19.25,9
SCK_RUN_U_programming_pay: P9_U_programming_pay.1 P9_U_programming_pay.3 S1_U_programming_pay.3 | length 10.8
  TOP w0.2: P9_U_programming_pay.3@64.75,16.5 64.77,16.48 67.2,16.48 P9_U_programming_pay.1
  TOP w0.254: P9_U_programming_pay.3@64.5,16.75 64.577,16.827 P9_U_programming_pay.3@64.66,16.827 ; P9_U_programming_pay.1@67.2,16.827 67.2,16.48 67.2,9.55 S1_U_programming_pay.3@67.75,9
SOLAR+: J2.1 P3.3 P3.4 P4.3 P4.4 P5.3 P5.4 P6.3 P6.4 R13.1 | length 1.5
  TOP w0.254: v1(77.75,21.5) 77.75,20.05 R13.1
  other v1: 74.25,2.75 74.25,4.25 74.25,5.75 74.25,7.25 86.25,10.5 86.25,12 86.25,13.5 86.25,21.5 86.25,23 86.25,24.5 86.25,32.5 86.25,34 86.25,35.5 86.25,43.5 86.25,45 86.25,46.5
SOLAR-: D11.2 J2.2 P3.1 P3.2 P4.1 P4.2 P5.1 P5.2 P6.1 P6.2 | length 1.5
  TOP w0.254: D11.2 v1(83.5,21.5)
  other v1: 87.75,2.75 87.75,4.25 87.75,5.75 87.75,7.25 86.25,16 86.25,17.5 86.25,19 86.25,27 86.25,28.5 86.25,30 86.25,38 86.25,39.5 86.25,41 86.25,49 86.25,50.5 86.25,52
VCC3V3: C1_U_misc_leds.2 C1_U_uart_leds.2 C2.2 J1.21 P1.2 P1.4 P1.6 P2.1 P2.3 P7_U_programming_eps.2 P7_U_programming_obc.2 P7_U_programming_pay.2 R1.2 U1_U_misc_leds.16 U1_U_uart_leds.16 U2.16 | length 8.4
  TOP w0.254: v1(25.5,50) C1_U_uart_leds.2 26.25,49.25 26.25,49.4 U1_U_uart_leds.16 ; U2.16 36.15,60.9 C2.2 v1(36.25,62) ; U1_U_misc_leds.16 C1_U_misc_leds.2@36.45,51.45 ; C1_U_misc_leds.2@36.45,51.2 C1_U_misc_leds.2 v1(36.5,52.25) ; R1.2 54.2,60.55 v1(54.25,60.5)
pads on no net: P3. P4. P5. P6. S2.1 S2.2 S2.3 S2.4 U2.6 U2.7 U2.9 U2.10

## Polygon pours and split planes (outlines as drawn)
VCC3V3 on VCC "VCC3V3_L03_P107" (solid, pour order 107): 0,90.3 72.5,90.3 72.5,0 0,0
SOLAR+ on VCC "SOLAR+_L03_P106" (solid, pour order 106): 73.5,54 96,54 96,0 73.5,0
BATT+ on VCC "BATT+_L03_P105" (solid, pour order 105): 73.5,90.3 73.5,55.5 96,55.5 96,90.3
GND on GND "GND_L02_P113" (solid, pour order 113): 0,90.3 72.5,90.3 72.5,0 0,0
SOLAR- on GND "SOLAR-_L02_P111" (solid, pour order 111): 73.5,54 96,54 96,0 73.5,0
BATT- on GND "BATT-_L02_P109" (solid, pour order 109): 73.5,90.3 96,90.3 96,55.5 73.5,55.5
BATT- on TOP "TOP-BATT-" (solid, pour order 141): 81.75,89.5 89.5,89.5 89.5,82 81.75,82
BATT+ on TOP "TOP-BATT+" (solid, pour order 139): 81.25,82 73.5,82 73.5,89.5 81.25,89.5
BATT- on TOP "TOP-BATT- 1" (solid, pour order 137): 87.75,63.25 87.75,71 95.25,71 95.25,63.25
BATT+ on TOP "TOP-BATT+ 1" (solid, pour order 135): 95.25,62.75 95.25,55 87.75,55 87.75,62.75
SOLAR+ on TOP "TOP-SOLAR+" (solid, pour order 133): 80.75,1 73,1 73,8.5 80.75,8.5
SOLAR- on TOP "TOP-SOLAR-" (solid, pour order 131): 81.25,8.5 89,8.5 89,1 81.25,1
SOLAR- on TOP "TOP-SOLAR- 1" (solid, pour order 129): 85.25,53 90.25,53 90.25,47.995 85.25,47.995
SOLAR+ on TOP "TOP-SOLAR+ 1" (solid, pour order 127): 85.25,47.5 90.25,47.5 90.25,42.495 85.25,42.495
SOLAR+ on TOP "TOP-SOLAR+ 2" (solid, pour order 125): 85.25,36.5 90.25,36.5 90.25,31.495 85.25,31.495
SOLAR- on TOP "TOP-SOLAR- 2" (solid, pour order 123): 85.25,42 90.25,42 90.25,36.995 85.25,36.995
SOLAR- on TOP "TOP-SOLAR- 3" (solid, pour order 121): 85.25,31 90.25,31 90.25,25.995 85.25,25.995
SOLAR+ on TOP "TOP-SOLAR+ 3" (solid, pour order 119): 85.25,25.5 90.25,25.5 90.25,20.495 85.25,20.495
SOLAR+ on TOP "TOP-SOLAR+ 4" (solid, pour order 117): 85.25,14.5 90.25,14.5 90.25,9.495 85.25,9.495
SOLAR- on TOP "TOP-SOLAR- 4" (solid, pour order 115): 85.25,20 90.25,20 90.25,14.995 85.25,14.995

## Other copper
TOP:
  pour cut-out: 32.178,33.467
  pour cut-out: 29.381,41.31

## Silkscreen, mask and mechanical layers (free items; w line width, h text height)
Top Overlay:
  lines w0.254: 3.96,14.75 5.16,13.5 7.84,13.5 9.04,14.75 ; 25.25,22 25.25,30 48.25,30 48.25,22 ; 1,22 1,30 24,30 24,22 ; 1,22 1,1 24,1 24,22 ; 1,22 24,22 ; 25.25,0.998 48.25,0.998 ; 25.25,0.998 25.25,21.998 ; 25.25,0.998 48.25,0.998 ; 25.25,0.998 25.25,21.998 ; 25.25,0.998 48.25,0.998 ; 25.25,0.998 25.25,21.998 ; 25.25,0.998 48.25,0.998 ; 25.25,0.998 25.25,21.998 ; 25.25,0.998 48.25,0.998 ; 25.25,0.998 25.25,21.998 ; 25.25,21.998 48.25,21.998 ; 25.25,21.998 48.25,21.998 ; 25.25,21.998 48.25,21.998 ; 25.25,21.998 48.25,21.998 ; 25.25,21.998 48.25,21.998 ; 28.21,14.748 29.41,13.498 ; 28.21,14.748 29.41,13.498 ; 28.21,14.748 29.41,13.498 ; 28.21,14.748 29.41,13.498 ; 28.21,14.748 29.41,13.498 ; 29.41,13.498 32.09,13.498 ; 29.41,13.498 32.09,13.498 ; 29.41,13.498 32.09,13.498 ; 29.41,13.498 32.09,13.498 ; 29.41,13.498 32.09,13.498 ; 32.09,13.498 33.29,14.748 ; 32.09,13.498 33.29,14.748 ; 32.09,13.498 33.29,14.748 ; 32.09,13.498 33.29,14.748 ; 32.09,13.498 33.29,14.748 ; 48.25,0.998 48.25,21.998 ; 48.25,0.998 48.25,21.998 ; 48.25,0.998 48.25,21.998 ; 48.25,0.998 48.25,21.998 ; 48.25,0.998 48.25,21.998 ; 49.5,1 72.5,1 ; 49.5,1 49.5,22 ; 49.5,1 72.5,1 ; 49.5,1 49.5,22 ; 49.5,1 72.5,1 ; 49.5,1 49.5,22 ; 49.5,1 72.5,1 ; 49.5,1 49.5,22 ; 49.5,22 72.5,22 ; 49.5,22 72.5,22 ; 49.5,22 72.5,22 ; 49.5,22 72.5,22 ; 49.5,22 49.5,30 72.5,30 72.5,22 ; 52.46,14.75 53.66,13.5 ; 52.46,14.75 53.66,13.5 ; 52.46,14.75 53.66,13.5 ; 52.46,14.75 53.66,13.5 ; 53.66,13.5 56.34,13.5 ; 53.66,13.5 56.34,13.5 ; 53.66,13.5 56.34,13.5 ; 53.66,13.5 56.34,13.5 ; 56.34,13.5 57.54,14.75 ; 56.34,13.5 57.54,14.75 ; 56.34,13.5 57.54,14.75 ; 56.34,13.5 57.54,14.75 ; 72.5,1 72.5,22 ; 72.5,1 72.5,22 ; 72.5,1 72.5,22 ; 72.5,1 72.5,22
  text "BATT+" at 78.25,80.75 h1.52 r270
  text "BATT-" at 83.25,80.75 h1.52 r270
  text "DO NOT PROBE WHILE ANTENNA CONNECTED" at 22.25,77.75 h1
  text "CANH" at 46,74.5 h1.52
  text "REL_A" at 26,74.25 h1
  text "CANH" at 38,74.25 h1
  text "REL_B" at 26,71.75 h1
  text "CANL" at 38,71.75 h1
  text "HERON MK II" at 10.5,69.75 h1
  text "CANL" at 46,69.5 h1.52
  text "SCL" at 28,69.25 h1
  text "CANH" at 38,69.25 h1
  text "SYS-DEBUG V2" at 10.5,68.099 h1
  text "SDA" at 28,66.75 h1
  text "CANL" at 38,66.75 h1
  text "!" at 0.924,65.356 h18
  text "BATT-" at 79.25,64.75 h1.52
  text "C_GATE" at 60,64 h1
  text "3V3" at 73,64 h1
  text "3V3" at 46,63.25 h1.52
  text "3V3" at 5.5,61.75 h1
  text "OBC_SCK" at 15.5,61.75 h1
  text "D_GATE" at 60,61.5 h1
  text "3V3" at 73,61.5 h1
  text "BATT+" at 79.25,59.75 h1.52
  text "3V3" at 5.5,59.25 h1
  text "OBC_RST" at 15.5,59.25 h1
  text "5V" at 64,59 h1
  text "3V3" at 73,59 h1
  text "5V" at 46,58.25 h1.52
  text "GND" at 5.5,56.75 h1
  text "EPS_SCK" at 15.5,56.75 h1
  text "+PACK" at 61,56.5 h1
  text "GND" at 73,56.5 h1
  text "GND" at 5.5,54.25 h1
  text "EPS_RST" at 15.5,54.25 h1
  text "RTC_BAT" at 59,54 h1
  text "GND" at 73,54 h1
  text "+PACK" at 46,53.25 h1.52
  text "MISO" at 4.75,51.75 h1
  text "PAY_SCK" at 15.5,51.75 h1
  text "GND" at 63,51.5 h1
  text "GND" at 73,51.5 h1
  text "TR_UART" at 1.75,49.25 h1
  text "PAY_RST" at 15.5,49.25 h1
  text "TRANS-UART" at 6.5,43.75 h1
  text "MISO" at 33.75,37 h1
  text "EN<->DIS" at 7.5,34.75 h1
  text "OBC" at 2,31 h1.52
  text "EPS" at 26.25,31 h1.52
  text "PAY" at 50.5,31 h1.52
  text "RST" at 2,27.5 h1
  text "RX" at 9.5,27.5 h1
  text "TX" at 17,27.5 h1
  text "RST" at 26.25,27.5 h1
  text "RX" at 33.75,27.5 h1
  text "TX" at 41.25,27.5 h1
  text "RST" at 50.5,27.5 h1
  text "RX" at 58,27.5 h1
  text "TX" at 65.5,27.5 h1
  text "TX" at 21.25,18.5 h1
  text "TX" at 45.5,18.498 h1
  text "TX" at 45.5,18.498 h1
  text "TX" at 45.5,18.498 h1
  text "TX" at 45.5,18.498 h1
  text "TX" at 45.5,18.498 h1
  text "TX" at 69.75,18.5 h1
  text "TX" at 69.75,18.5 h1
  text "TX" at 69.75,18.5 h1
  text "TX" at 69.75,18.5 h1
  text "SOLAR+" at 77.75,18 h1.52 r270
  text "SOLAR-" at 82.75,18 h1.52 r270
  text "RX" at 21.25,16 h1
  text "RX" at 45.5,15.998 h1
  text "RX" at 45.5,15.998 h1
  text "RX" at 45.5,15.998 h1
  text "RX" at 45.5,15.998 h1